# Altium PCB WUT-4-3-3.PcbDoc (part 1 of 2)
Units mil, origin at the board's own origin, x right, y up, seen from the top; angles counter-clockwise.
Board outline 3346.46 x 2204.72 mil, 4 copper layers (Top Layer, GND Plane, 3V3 Plane, Bottom Layer), stack 30.635 mil thick; 173 components, 315 nets, 1031 pads, 178 vias.
Unrouted connection lines stored in the file: 396.
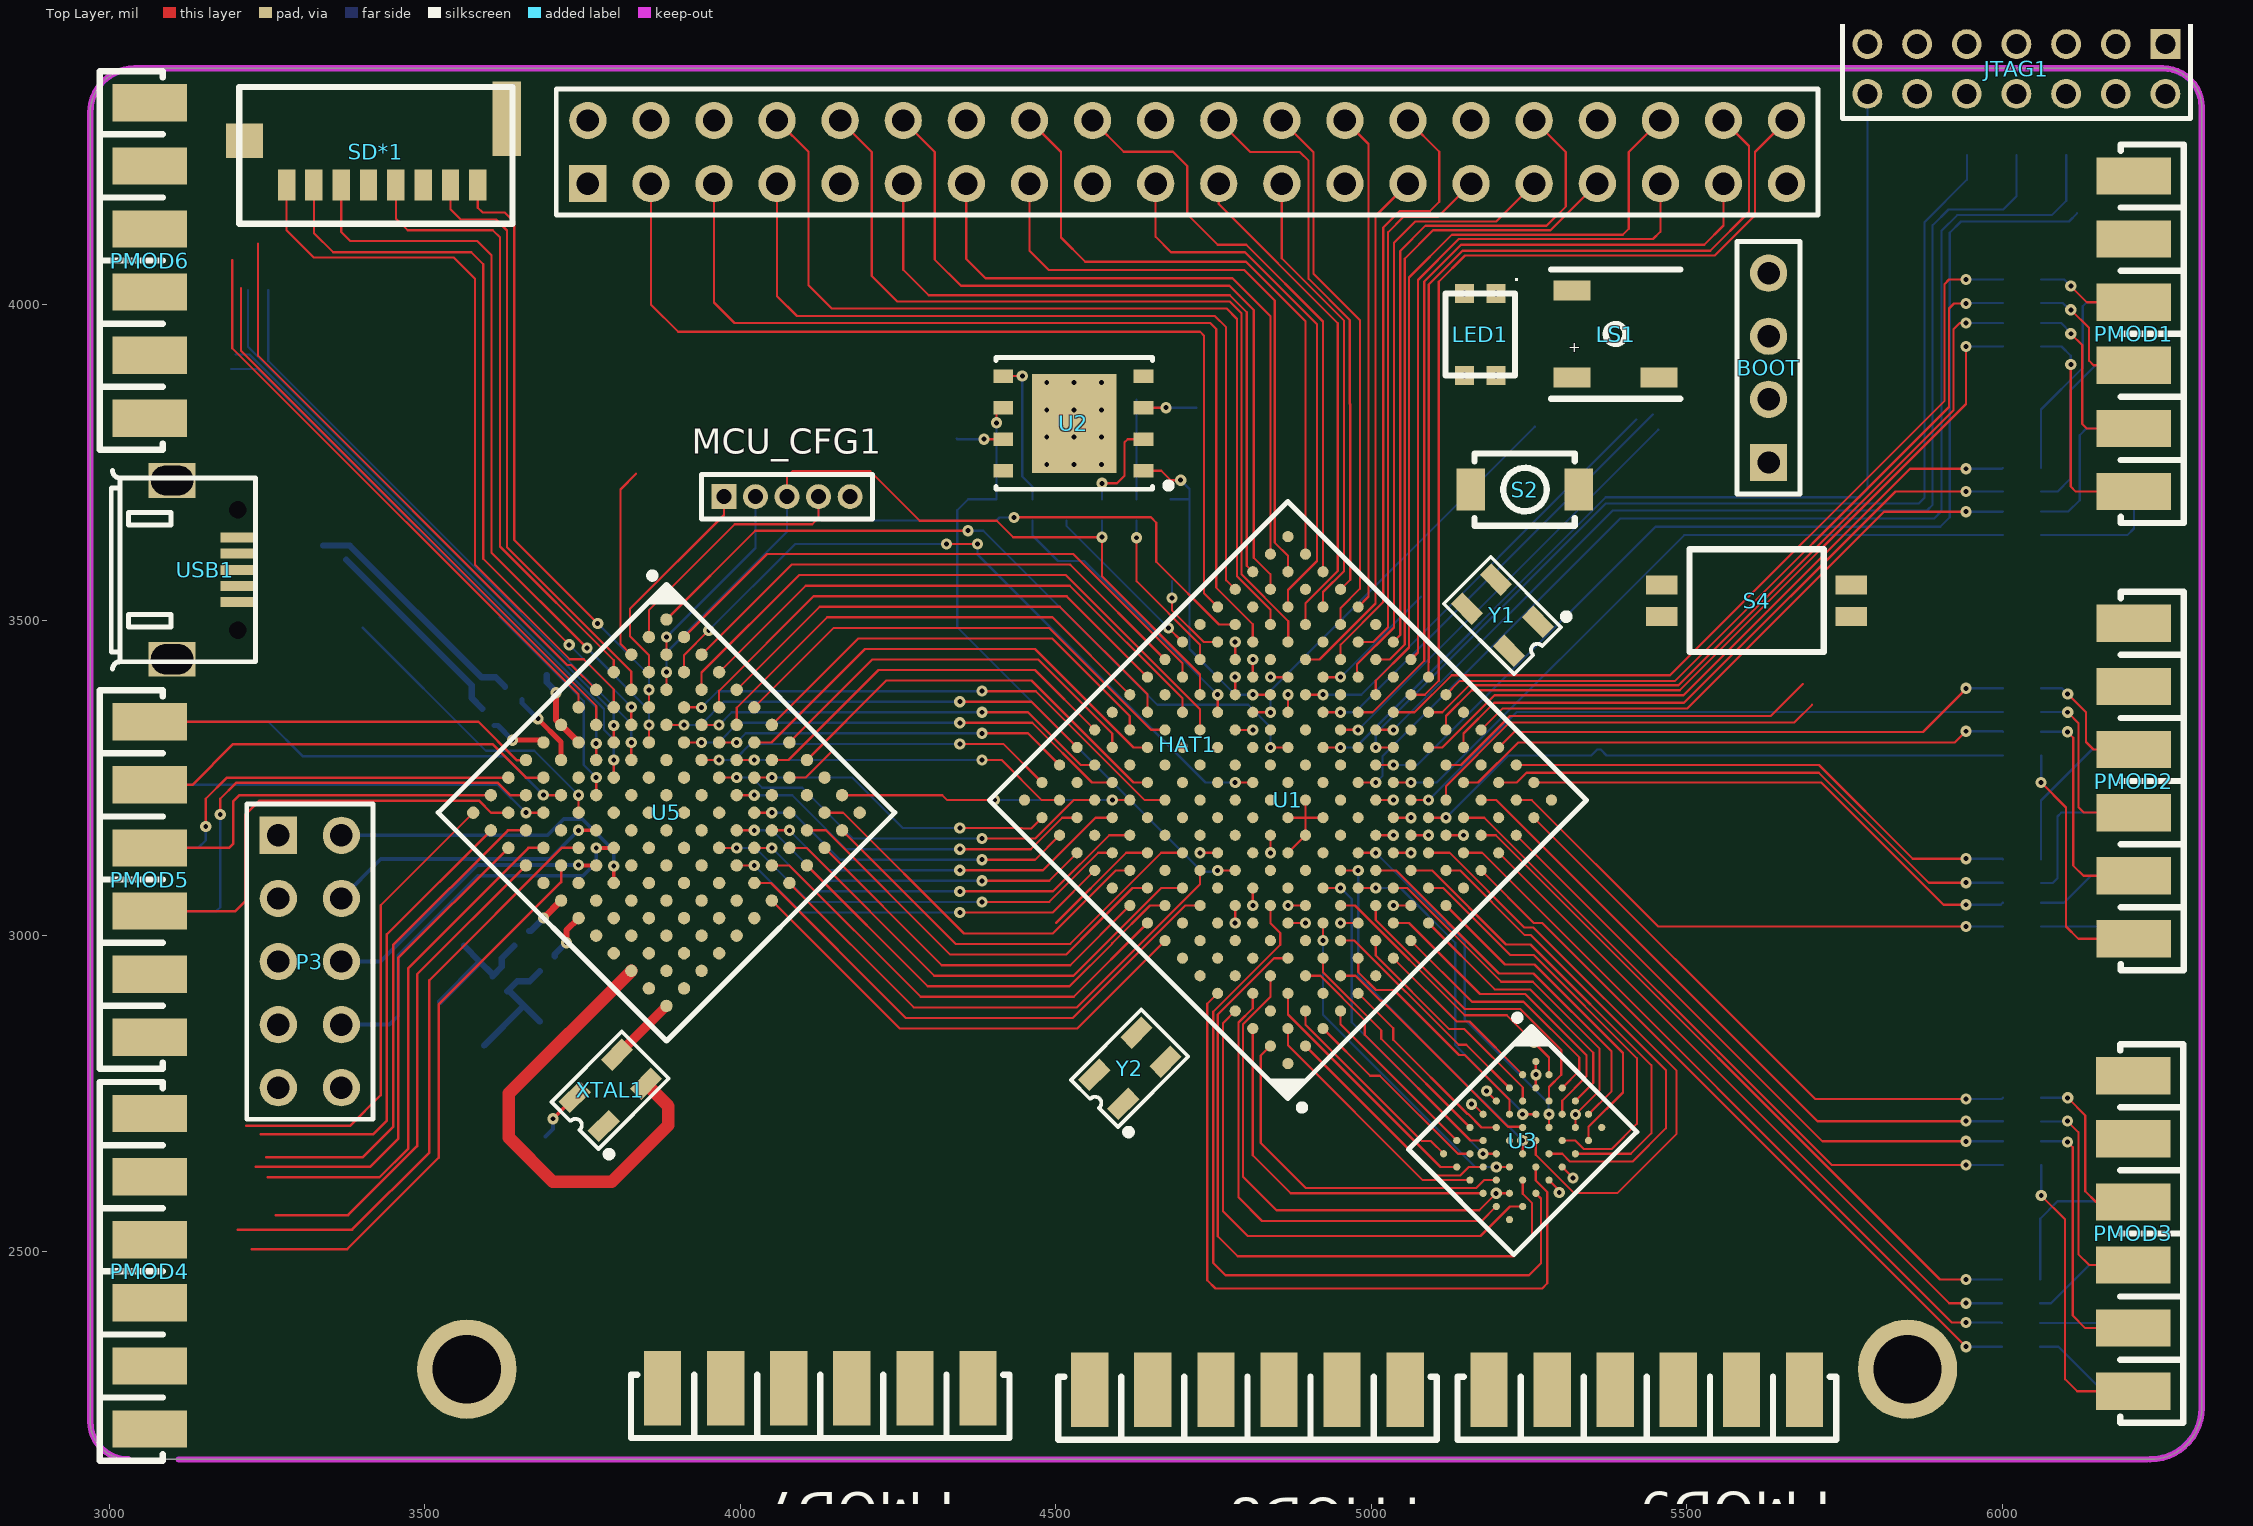
[diagram p0: Top Layer view]
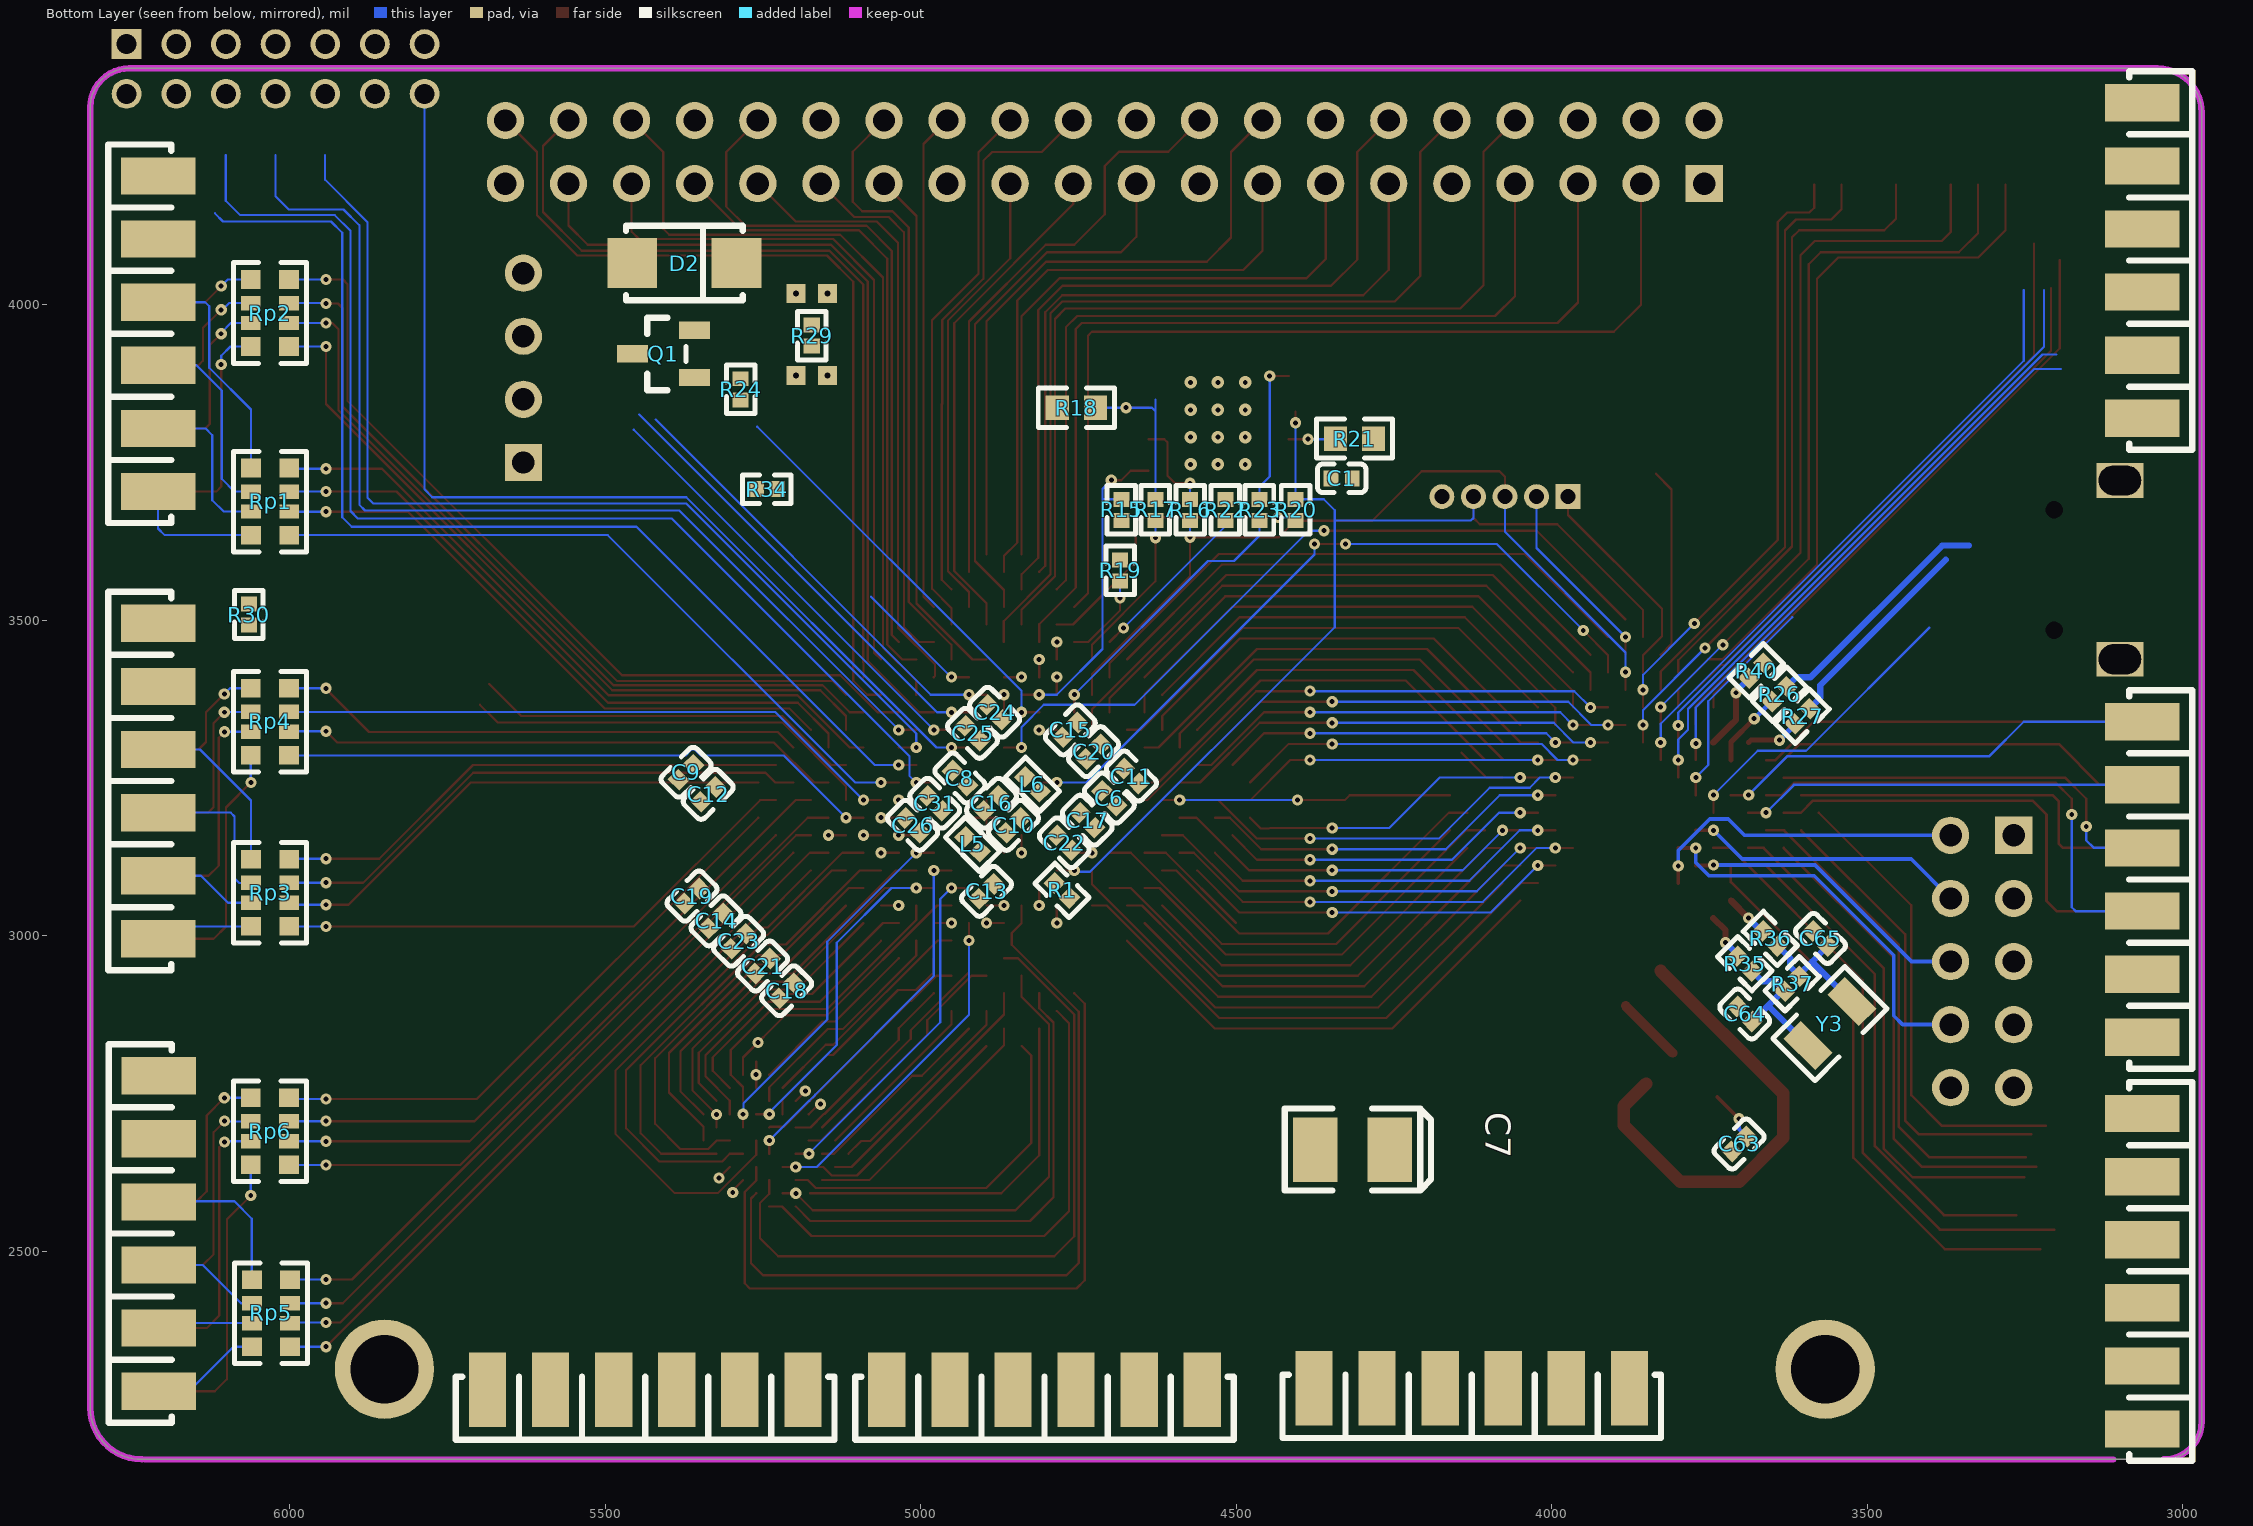
[diagram p1: Bottom Layer view, seen from below]
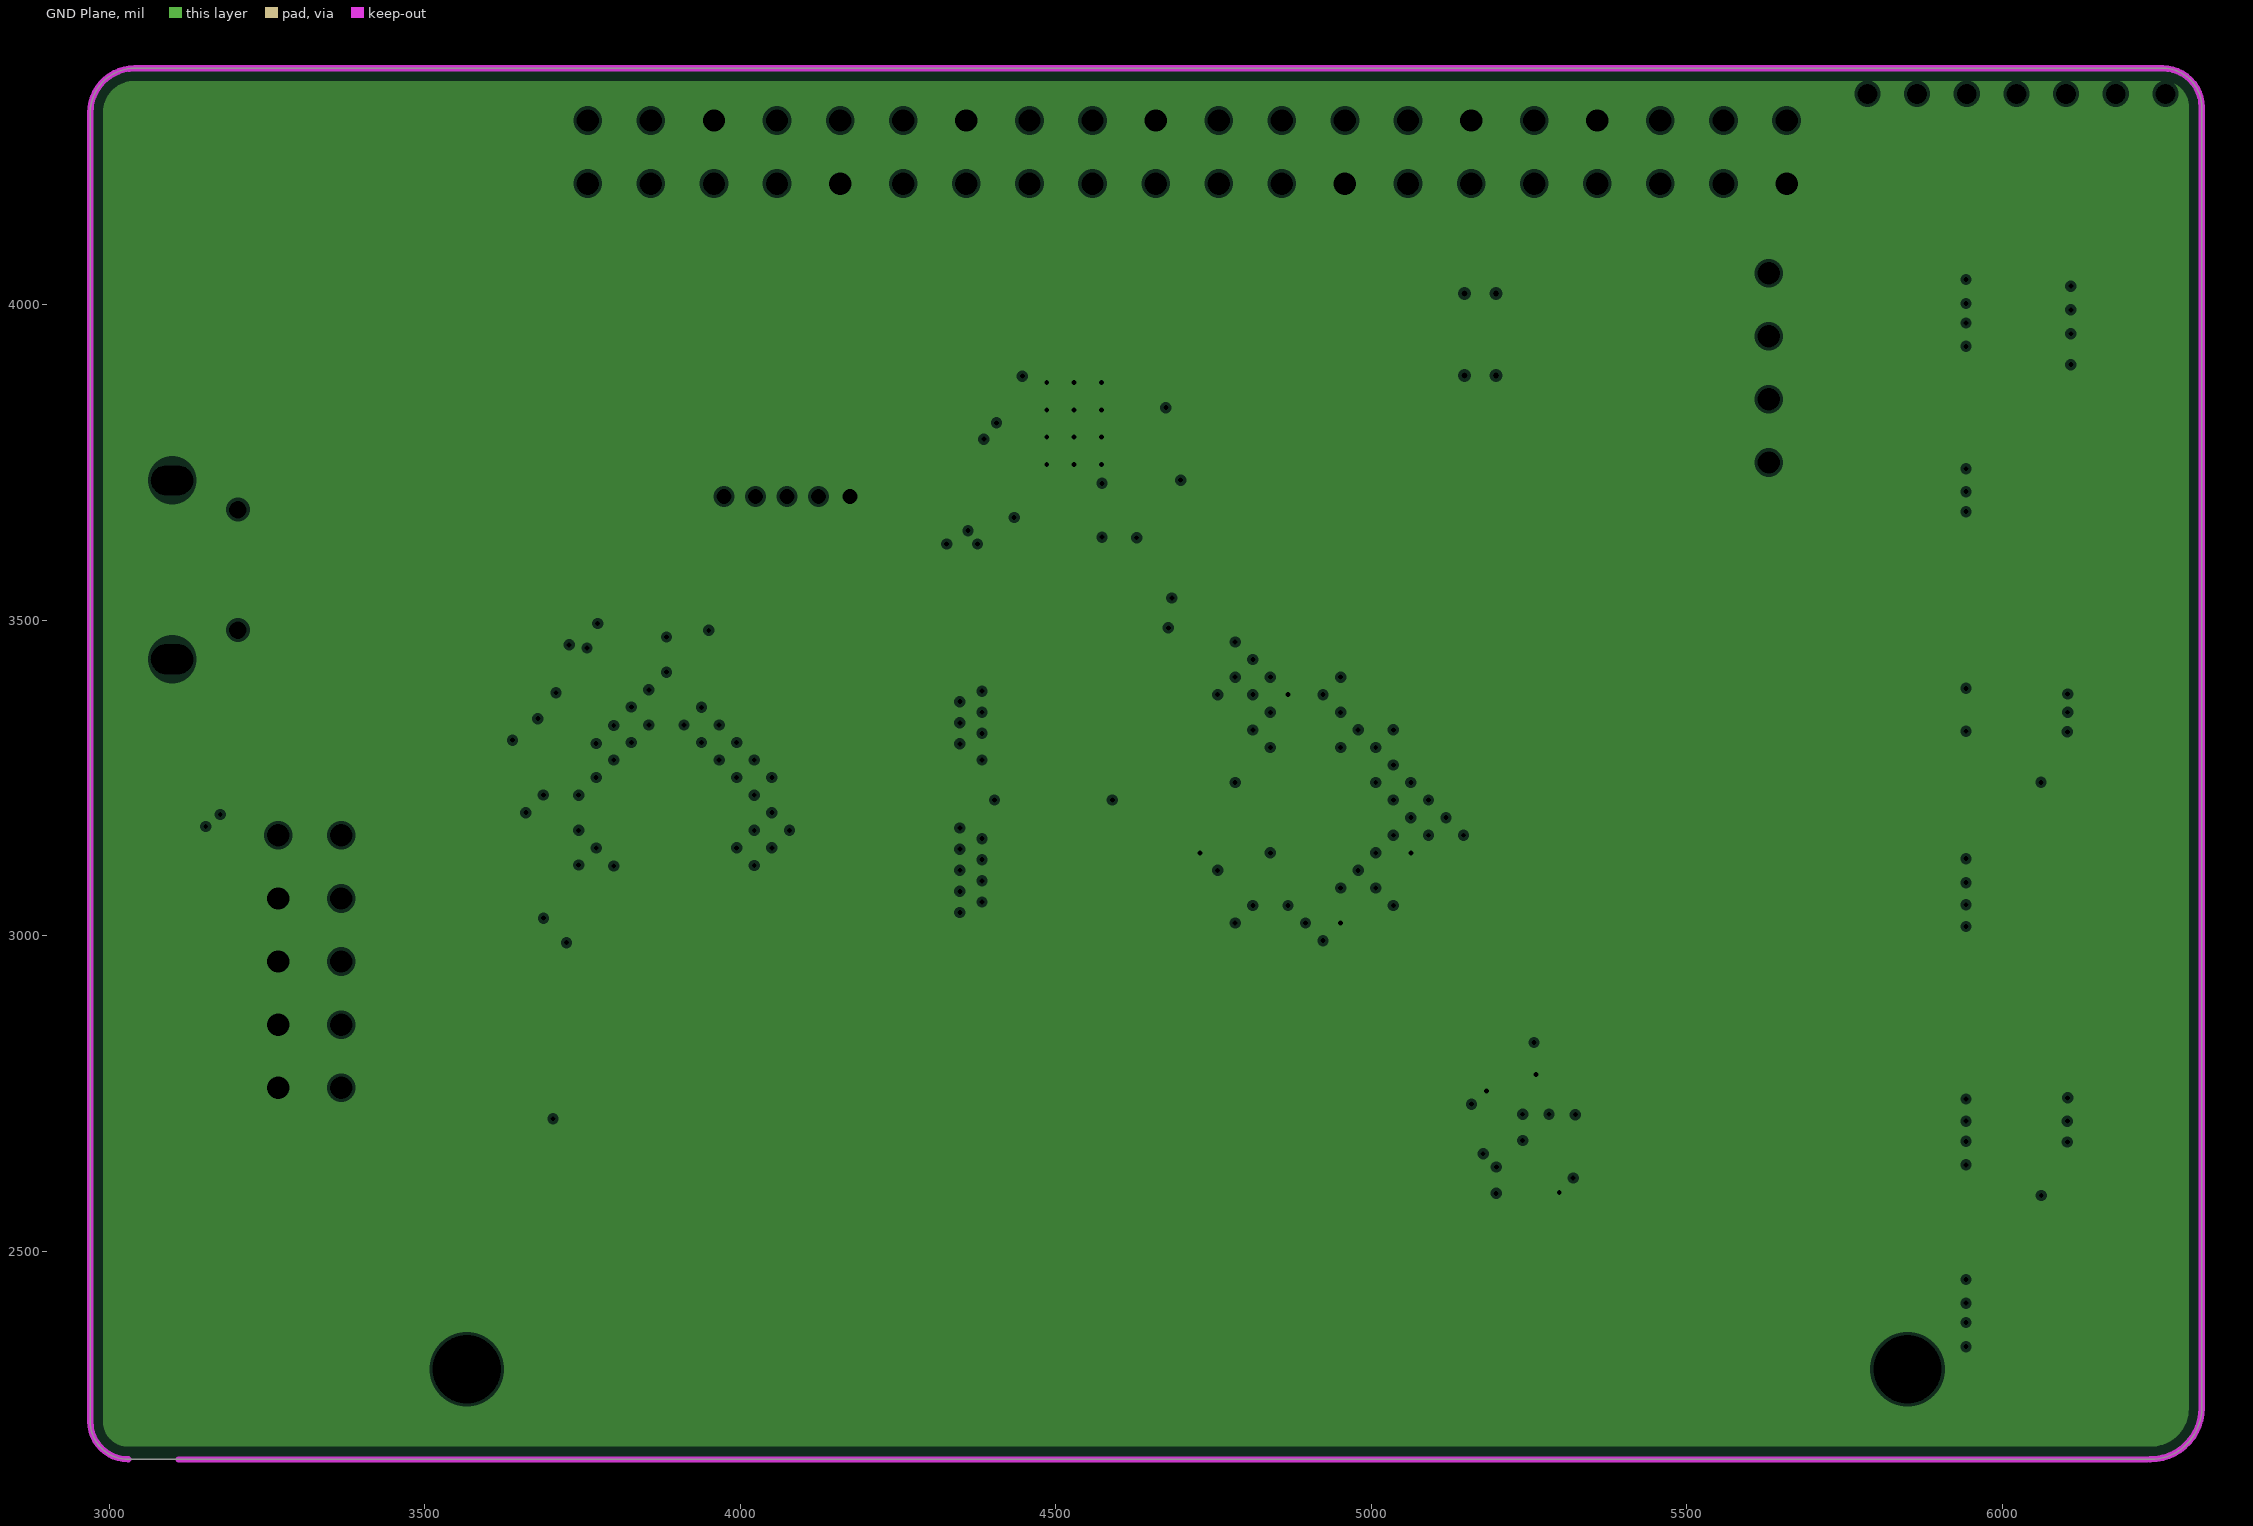
[diagram p2: GND Plane, clearances drawn from the general rule]
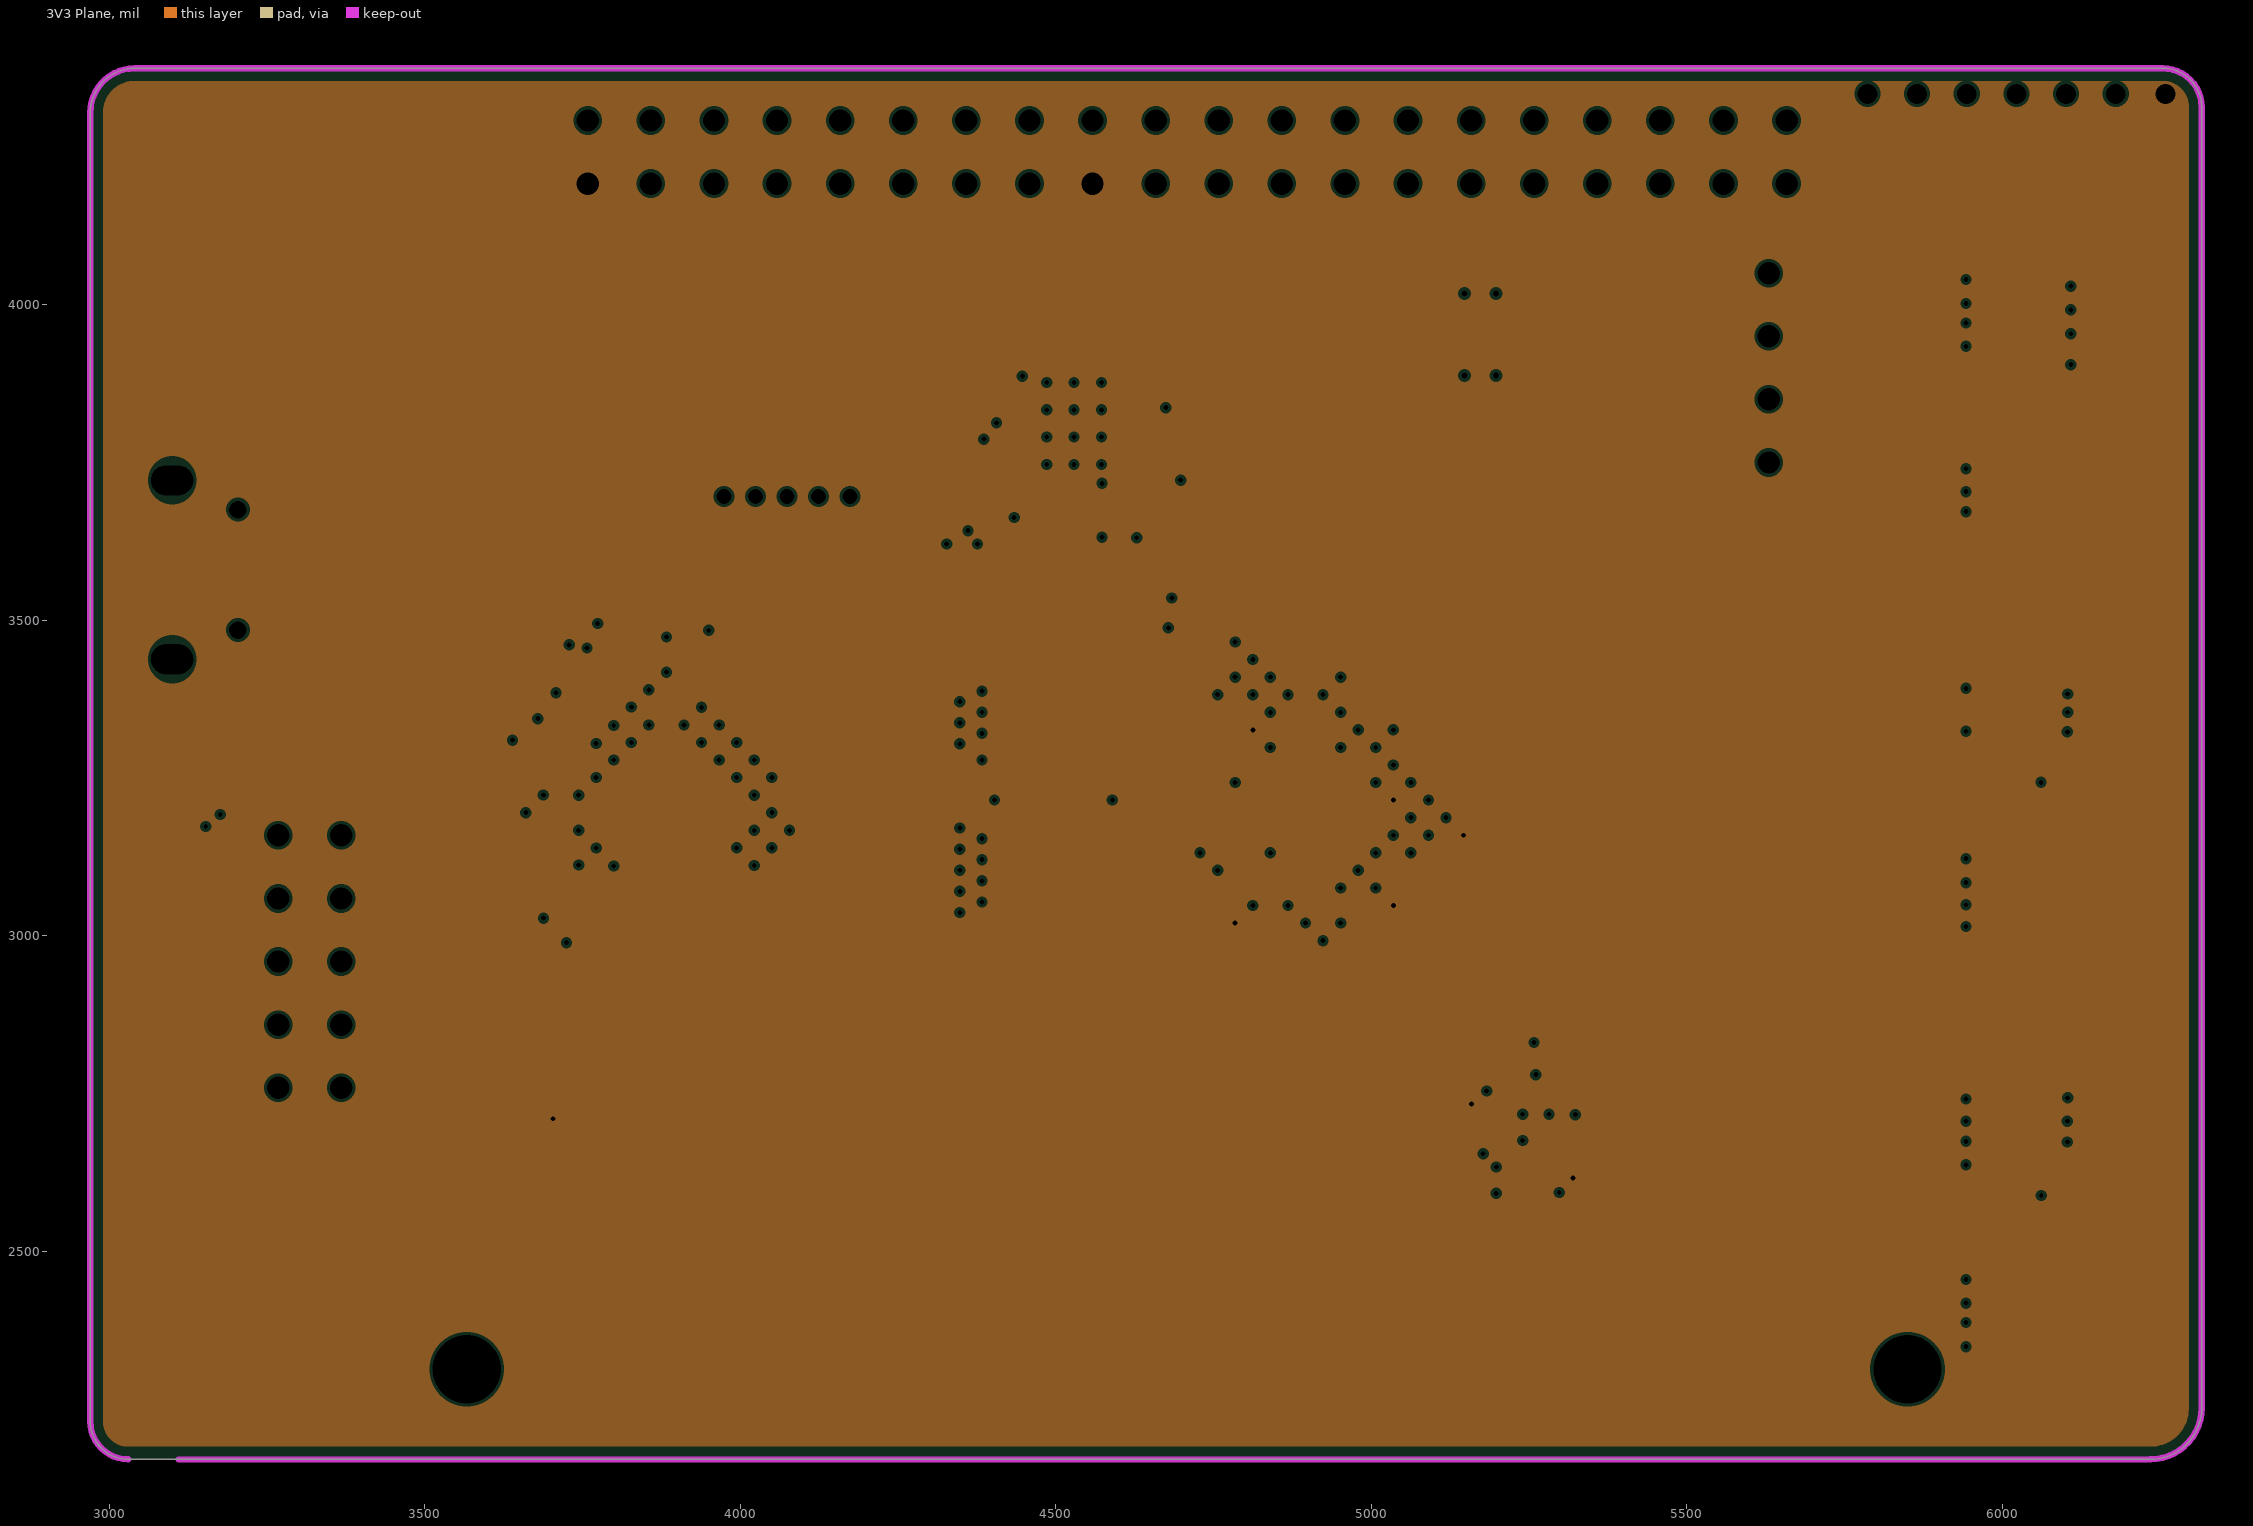
[diagram p3: 3V3 Plane, clearances drawn from the general rule]

## Layer stack, top to bottom
Top Solder: solder mask 0.4, Solder Resist, Dk 3.5
Top Layer: signal copper 1.4
Dielectric 1: core 10, FR-4, Dk 4.2
GND Plane: plane copper 1.4173, net GND
Dielectric 3: prepreg 5, Dk 4.2
3V3 Plane: plane copper 1.4173, net 3V3
Dielectric 2: core 10, Dk 4.2
Bottom Layer: signal copper 1.4
Bottom Solder: solder mask 0.4, Solder Resist, Dk 3.5

## Board outline
2970,2230 ccw(c3030,2230) 3030,2170 6235,2170 ccw(c6235,2251.46) 6316.46,2251.46 6316.46,4313.04 ccw(c6254.78,4313.04) 6254.78,4374.72 3040.22,4374.72 ccw(c3040.22,4304.5) 2970,4304.5

## Design rules (kind name [scope] priority, off if disabled: settings)
Clearance [All] p1: gap=5 ignorepadtopadclearanceinfootprint=FALSE except(0: Arc-Hole Track-Hole SMDPad-Hole THPad-Hole Via-Hole Fill-Hole Poly-Hole Region-Hole Text-Hole; 3.5: Arc-Arc Arc-Track Track-Track; 10: Arc-Text Track-Text SMDPad-Text THPad-Text Via-Text Fill-Text Poly-Text Region-Text Text-Text)
DiffPairsRouting [All] p1: maxlimit=10 minlimit=10 mostfreqgap=10 toplayer_minwidth=6 toplayer_maxwidth=15 toplayer_prefwidth=15 bottomlayer_minwidth=6 bottomlayer_maxwidth=15 bottomlayer_prefwidth=15 maxuncoupledlength=500
PlaneClearance [All] p1: clearance=5
PlaneConnect [All] p1: planeconnectstyle=Direct reliefexpansion=20 reliefentries=4 reliefconductorwidth=10 reliefairgap=10
PolygonConnect [All] p1: connectstyle=Relief reliefconductorwidth=10 reliefentries=4 polygonreliefangle="90 Angle" airgapwidth=10
RoutingVias [All] p1: holewidth=7.87 width=17.72 viastyle="Through Hole" minholewidth=7.87 minwidth=17.72 maxholewidth=248.03 maxwidth=50
SolderMaskExpansion [All] p1: expansion=4
Width [All] p1: maxlimit=80 minlimit=3.5 preferedwidth=10 minimp=50.000000 maximp=50.000000 favimp=50.000000
27 further rules are at their usual default settings.

## Classes and differential pairs
net class SRAM-DQ[15..0]: SRAM-DQ0 SRAM-DQ1 SRAM-DQ2 SRAM-DQ3 SRAM-DQ4 SRAM-DQ5 SRAM-DQ6 SRAM-DQ7 SRAM-DQ8 SRAM-DQ9 SRAM-DQ10 SRAM-DQ11 SRAM-DQ12 SRAM-DQ13 SRAM-DQ14 SRAM-DQ15
net class SRAM-A[19..0]: SRAM-A0 SRAM-A1 SRAM-A2 SRAM-A3 SRAM-A4 SRAM-A5 SRAM-A6 SRAM-A7 SRAM-A8 SRAM-A9 SRAM-A10 SRAM-A11 SRAM-A12 SRAM-A13 SRAM-A14 SRAM-A15 SRAM-A16 SRAM-A17 SRAM-A18 SRAM-A19
net class PTE[5..0]: PTE0 PTE1 PTE2 PTE3 PTE4 PTE5 PTE6 PTE7 PTE8 PTE9 PTE10 PTE11 PTE12 PTE24 PTE25 PTE26 PTE27 PTE28
net class FB_AD[31..0]: FB_AD0 FB_AD1 FB_AD2 FB_AD3 FB_AD4 FB_AD5 FB_AD6 FB_AD7 FB_AD8 FB_AD9 FB_AD10 FB_AD11 FB_AD12 FB_AD13 FB_AD14 FB_AD15 FB_AD16 FB_AD17 FB_AD18 FB_AD19 FB_AD20 FB_AD21 FB_AD22 FB_AD23 FB_AD24 FB_AD25 FB_AD26 FB_AD27 FB_AD28 FB_AD29 FB_AD30 FB_AD31
net class BANK15_IO[9..1]: BANK15_IO1 BANK15_IO2 BANK15_IO3 BANK15_IO4 BANK15_IO5 BANK15_IO6 BANK15_IO7 BANK15_IO8 BANK15_IO9
net class BANK14_IO[42..1]: BANK14_IO1 BANK14_IO2 BANK14_IO3 BANK14_IO4 BANK14_IO5 BANK14_IO6 BANK14_IO7 BANK14_IO8 BANK14_IO9 BANK14_IO10 BANK14_IO11 BANK14_IO12 BANK14_IO13 BANK14_IO14 BANK14_IO15 BANK14_IO16 BANK14_IO17 BANK14_IO18 BANK14_IO19 BANK14_IO20 BANK14_IO21 BANK14_IO22 BANK14_IO23 BANK14_IO24 BANK14_IO25 BANK14_IO26 BANK14_IO27 BANK14_IO28 BANK14_IO29 BANK14_IO30 BANK14_IO31 BANK14_IO32 BANK14_IO33 BANK14_IO34 BANK14_IO35 BANK14_IO36 BANK14_IO37 BANK14_IO38 BANK14_IO39 BANK14_IO40 BANK14_IO41 BANK14_IO42
net class ANALOG[13..0]: ANALOG0 ANALOG1 ANALOG2 ANALOG3 ANALOG4 ANALOG5 ANALOG6 ANALOG7 ANALOG8 ANALOG9 ANALOG10 ANALOG11 ANALOG12 ANALOG13
component class MEMORY: C72 C73 R42 R43 R44 U3
component class MCU: C63 C64 C65 C66 C67 C68 C69 C70 C71 D4 FB5 P3 R35 R36 R37 R38 R39 R40 R41 S6 U5 XTAL1 Y3
component class IO: C59 C60 C61 C62 D1 D2 D3 F1 HAT1 L3 L4 LED1 LS1 LS2 P1 P2 PCAM PMOD1 PMOD2 PMOD3 PMOD4 PMOD5 PMOD6 PMOD7 PMOD8 PMOD9 Q1 Q2 R24 R25 R26 R27 R28 R29 R30 R31 R32 R33 R34 Rp1 Rp2 Rp3 Rp4 Rp5 Rp6 S2 S3 S4 S5 SD*1 USB1
component class FPGA_Power: C6 C7 C8 C9 C10 C11 C12 C13 C14 C15 C16 C17 C18 C19 C20 C21 C22 C23 C24 C25 C26 C27 C28 C29 C30 C31 C32 C33 C34 C35 C36 C37 C38 C39 C40 C41 C42 C43 C44 C45 C46 C47 C48 C49 C50 C51 C52 C53 C54 C55 C56 C57 C58 L5 L6
component class FPGA_IO: C1 C2 C3 C4 C5 FB1 FB2 R15 R16 R17 R18 R19 R20 R21 R22 R23 U2 Y1 Y2
component class FPGA_CFG: BOOT JTAG1 L1 L2 MCU_CFG1 R1 R2 R3 R4 R5 R6 R7 R8 R9 R10 R11 R12 R13 R14 S1 U1
differential pair USB0: +USB0_P -USB0_N
differential pair USB0D: +USB0D_P -USB0D_N

## Components (designator, comment, footprint, x,y, rotation, side; value= is the part's Value field where it differs from the comment)
BOOT "Header 4" HDR1X4 5630,3750 r90 top
C1 "100nF (104) 10% 16V" 0402_C 4333.06,3724.84 r180 bottom
C2 "100nF (104) 10% 16V" 0402_C 7445,2140 r180 bottom
C3 "100pF (101) 5% 50V" 0402_C 7615,2140 r180 bottom
C4 "100nF (104) 10% 16V" 0402_C 7785,2140 r180 bottom
C5 "100pF (101) 5% 50V" 0402_C 7955,2140 r180 bottom
C6 "10uF (106) 20% 6.3V" 0402_C 4701.33,3218.01 r45 bottom
C7 "100uF (107) ±10% 6.3V" CASE-B_3528 4316,2661 r180 bottom
C8 "33nF (333) 20% 50V" 0402_C 4938.16,3249.84 r45 bottom
C9 "10uF (106) 20% 6.3V" 0402_C 5372.17,3258.96 r315 bottom
C10 "470nF (474) 10% 10V" 0402_C 4853.16,3174.84 r135 bottom
C11 "470nF (474) 10% 10V" 0402_C 4666.33,3253.01 r45 bottom
C12 "4.7uF (475) 20% 10V" 0402_C 5337.17,3223.96 r315 bottom
C13 "4.7uF (475) 20% 10V" 0402_C 4896,3070.24 r135 bottom
C14 "33nF (333) 20% 50V" 0402_C 5324.75,3023.45 r135 bottom
C15 "470nF (474) 10% 10V" 0402_C 4763.16,3326.19 r315 bottom
C16 "10nF (103) 10% 50V" 0402_C 4888.16,3209.84 r135 bottom
C17 "33nF (333) 20% 50V" 0402_C 4736.33,3183.01 r45 bottom
C18 "4.7uF (475) 20% 10V" 0402_C 5212.83,2912.62 r135 bottom
C19 "33nF (333) 20% 50V" 0402_C 5362.82,3062.73 r135 bottom
C20 "470nF (474) 10% 10V" 0402_C 4726.33,3291.67 r315 bottom
C21 "470nF (474) 10% 10V" 0402_C 5250.9,2951.91 r135 bottom
C22 "33nF (333) 20% 50V" 0402_C 4772.81,3147.33 r45 bottom
C23 "470nF (474) 10% 10V" 0402_C 5288.97,2991.19 r135 bottom
C24 "33nF (333) 20% 50V" 0402_C 4883.16,3354.03 r225 bottom
C25 "33nF (333) 20% 50V" 0402_C 4918.16,3320.67 r225 bottom
C26 "33nF (333) 20% 50V" 0402_C 5013.16,3174.84 r225 bottom
C27 "33nF (333) 20% 50V" 0402_C 4060,4755 r90 bottom
C28 "33nF (333) 20% 50V" 0402_C 3990,5065 r90 bottom
C29 "33nF (333) 20% 50V" 0402_C 3970,5350 r90 bottom
C30 "33nF (333) 20% 50V" 0402_C 3860,5590 r90 bottom
C31 "470nF (474) 10% 10V" 0402_C 4978.16,3209.84 r225 bottom
C32 "33nF (333) 20% 50V" 0402_C 4120,4760 r90 bottom
C33 "470nF (474) 10% 10V" 0402_C 4055,5060 r90 bottom
C34 "470nF (474) 10% 10V" 0402_C 4025,5355 r90 bottom
C35 "33nF (333) 20% 50V" 0402_C 3920,5590 r90 bottom
C36 "470nF (474) 10% 10V" 0402_C 4180,4760 r90 bottom
C37 "470nF (474) 10% 10V" 0402_C 4115,5060 r90 bottom
C38 "470nF (474) 10% 10V" 0402_C 4090,5360 r90 bottom
C39 "470nF (474) 10% 10V" 0402_C 3985,5590 r90 bottom
C40 "470nF (474) 10% 10V" 0402_C 4245,4755 r90 bottom
C41 "470nF (474) 10% 10V" 0402_C 4180,5060 r90 bottom
C42 "470nF (474) 10% 10V" 0402_C 4160,5360 r90 bottom
C43 "470nF (474) 10% 10V" 0402_C 4045,5585 r90 bottom
C44 "470nF (474) 10% 10V" 0402_C 4315,4760 r90 bottom
C45 "470nF (474) 10% 10V" 0402_C 4245,5055 r90 bottom
C46 "470nF (474) 10% 10V" 0402_C 4240,5355 r90 bottom
C47 "470nF (474) 10% 10V" 0402_C 4110,5585 r90 bottom
C48 "470nF (474) 10% 10V" 0402_C 4375,4760 r90 bottom
C49 "10uF (106) 20% 6.3V" 0402_C 4315,5050 r90 bottom
C50 "10uF (106) 20% 6.3V" 0402_C 4315,5355 r90 bottom
C51 "470nF (474) 10% 10V" 0402_C 4175,5585 r90 bottom
C52 "4.7uF (475) 20% 10V" 0402_C 4445,4760 r90 bottom
C53 "100uF (107) ±10% 6.3V" CASE-B_3528 4425,5015 r90 bottom
C54 "100uF (107) ±10% 6.3V" CASE-B_3528 4430,5350 r90 bottom
C55 "4.7uF (475) 20% 10V" 0402_C 4230,5585 r90 bottom
C56 "4.7uF (475) 20% 10V" 0402_C 4515,4760 r90 bottom
C57 "4.7uF (475) 20% 10V" 0402_C 4300,5580 r90 bottom
C58 "100uF (107) ±10% 6.3V" CASE-B_3528 4630,4755 r90 bottom
C59 "22uF (226) 20% 6.3V" 0603_C 7302,3221 r90 bottom
C60 "22uF (226) 20% 6.3V" 0603_C 5672,5098 r90 bottom
C61 "22uF (226) 20% 6.3V" 0603_C 4677,5123 r180 bottom
C62 "22uF (226) 20% 6.3V" 0603_C 3327,5098 r90 bottom
C63 "100nF (104) 10% 16V" 0402_C 3703.16,2669.84 r135 bottom
C64 "12pF (120) 5% 50V" 0402_C 3694.33,2875.84 r45 bottom
C65 "12pF (120) 5% 50V" 0402_C 3574.23,2995.6 r45 bottom
C66 "10nF (103) 10% 50V" 0402_C 4337,6288 r90 bottom
C67 "100nF (104) 10% 16V" 0402_C 4107,6288 r90 bottom
C68 "100nF (104) 10% 16V" 0402_C 4567,6288 r90 bottom
C69 "100nF (104) 10% 16V" 0402_C 4797,6288 r90 bottom
C70 "100nF (104) 10% 16V" 0402_C 5027,6288 r90 bottom
C71 "100nF (104) 10% 16V" 0402_C 8657,4411 r90 bottom
C72 "Cap" 1608[0603] 3312,6743 r90 top value=104P
C73 "Cap" 1608[0603] 3542,6743 r90 top value=104P
D1 "SS54" SMA(DO-214AC)_S1 7115,4965 r90 bottom
D2 "SS54" SMA(DO-214AC)_S1 5375,4066 r0 bottom
D3 "SS54" SMA(DO-214AC)_S1 9327,3106 r90 bottom
D4 "SK34" C2012 5317,6278 r0 top
F1 "Fuse 1" 1206 7325,5095 r0 top
FB1 "600Ω ±25% 100MHz" 0805_L 9060,2125 r180 bottom
FB2 "600Ω ±25% 100MHz" 0805_L 9270,2125 r180 bottom
FB5 "100Ω ±25% 100MHz" 0805_L 3362,6288 r180 bottom
HAT1 "respberry-HAT" RESPBERRY-HAT 4708.5,4242 r0 top locked
JTAG1 "MHDR2X7" "Hearder2 7X2" 6259,4413 r270 top
L1 "LED" 1608[0603] 8630,1735 r0 top
L2 "LED" 1608[0603] 8780,1735 r0 top
L3 "LED" 1608[0603] 8415,3775 r0 top
L4 "LED" 1608[0603] 8035,3775 r0 top
L5 "10nH 5%" 0402_L 4918.16,3144.84 r45 bottom
L6 "39nH" 0402_L 4823.16,3239.84 r45 bottom
LED1 "RGB_LED1206" RGB 5173,3952.73 r270 top
LS1 "Bell" "MLT-5020 BZ" 5387.5,3953.48 r0 top
LS2 "Bell" BZ 2345,3755 r0 top
MCU_CFG1 "Header 5" MHDR1X5 3974.22,3695.84 r0 top
P3 "JTAG" HDR2X5 3268,3159 r270 top
PCAM "Header 15" FFC/SM0.5-2H15 5353,1559 r0 top
PMOD1 "Header 6X2A" "SMT-HEADER 6*2" 6209,3954 r0 top
PMOD2 "Header 6X2A" "SMT-HEADER 6*2" 6209,3245 r0 top
PMOD3 "Header 6X2A" "SMT-HEADER 6*2" 6208,2528 r0 top
PMOD4 "Header 6X2A" "SMT-HEADER 6*2" 3064,2468 r180 top
PMOD5 "Header 6X2A" "SMT-HEADER 6*2" 3064,3089 r180 top
PMOD6 "Header 6X2A" "SMT-HEADER 6*2" 3064,4070 r180 top
PMOD7 "Header 6X2A" "SMT-HEADER 6*2" 4127,2283 r270 top
PMOD8 "Header 6X2A" "SMT-HEADER 6*2" 4804,2280 r270 top
PMOD9 "Header 6X2A" "SMT-HEADER 6*2" 5437,2280 r270 top
Q1 "SS8050 Y1" SOT-23(SOT-23-3) 5408,3922 r180 bottom
Q2 "SS8050 Y1" SOT-23(SOT-23-3) 8402,3221 r180 bottom
R1 "4.7KΩ (4701) ±1%" 0402_R 4776.33,3071.65 r45 bottom
R2 "Res" 1608[0603] 7610,1735 r0 top value=1K
R3 "不贴" 1608[0603] 7100,1735 r0 top value=1K
R4 "不贴" 1608[0603] 7780,1735 r0 top value=1K
R5 "Res" 1608[0603] 7270,1735 r0 top value=1K
R6 "不贴" 1608[0603] 7950,1735 r0 top value=1K
R7 "Res" 1608[0603] 7440,1735 r0 top value=1K
R8 "200Ω (2000) ±1%" 0402_R 9760,1730 r180 bottom
R9 "100Ω (1000) ±1%" 0402_R 9220,1730 r180 bottom
R10 "4.7KΩ (4701) ±1%" 0402_R 9915,1715 r90 bottom
R11 "4.7KΩ (4701) ±1%" 0402_R 10150,1730 r180 bottom
R12 "100Ω (1000) ±1%" 0402_R 9375,1715 r90 bottom
R13 "10KΩ (1002) ±1%" 0402_R 10665,1715 r90 bottom
R14 "10KΩ (1002) ±1%" 0402_R 10885,1715 r90 bottom
R15 "4.7KΩ (4701) ±1%" 0402_R 4682.22,3674.84 r270 bottom
R16 "100Ω (1000) ±1%" 0402_R 4573.4,3674.84 r90 bottom
R17 "100Ω (1000) ±1%" 0402_R 4628.4,3674.84 r90 bottom
R18 "1.8KΩ (1801) ±1%" 0603_R 4753.59,3836.84 r0 bottom
R19 "1KΩ (1001) ±1%" 0402_R 4684.22,3578.84 r90 bottom
R20 "49.9Ω (49R9) ±1%" 0402_R 4406.22,3674.84 r90 bottom
R21 "1.8KΩ (1801) ±1%" 0603_R 4312.85,3787.84 r180 bottom
R22 "100Ω (1000) ±1%" 0402_R 4517.4,3674.84 r270 bottom
R23 "100Ω (1000) ±1%" 0402_R 4463.4,3674.84 r270 bottom
R24 "1.5KΩ (1501) ±1%" 0402_R 5285.74,3866 r90 bottom
R25 "1.5KΩ (1501) ±1%" 0402_R 8557,3241 r90 bottom
R26 "0Ω (0R0) ±1%" 0402_R 3639.22,3382.84 r315 bottom
R27 "0Ω (0R0) ±1%" 0402_R 3603.22,3347.84 r315 bottom
R28 "390Ω (3900) ±1%" 0805_R 7125,1115 r180 bottom
R29 "1KΩ (1001) ±1%" 0402_R 5173,3951 r90 bottom
R30 "1KΩ (1001) ±1%" 0402_R 6065,3509 r90 bottom
R31 "0Ω (0R0) ±1%" 0402_R 6242,5118 r90 bottom
R32 "2KΩ (2001) ±1%" 0402_R 8180,3755 r90 bottom
R33 "2KΩ (2001) ±1%" 0402_R 9467,3241 r90 bottom
R34 "1KΩ (1001) ±1%" 0402_R 5244,3707.83 r180 bottom
R35 "0Ω (0R0) ±1%" 0402_R 3694.23,2955.6 r225 bottom
R36 "0Ω (0R0) ±1%" 0402_R 3653.68,2995.6 r225 bottom
R37 "1MΩ (1004) ±1%" 0402_R 3619.23,2923.84 r315 bottom
R38 "0Ω (0R0) ±1%" 0402_R 5742,6288 r90 bottom
R39 "10KΩ (1002) ±1%" 0402_R 5972,6288 r90 bottom
R40 "10KΩ (1002) ±1%" 0402_R 3676,3420 r315 bottom
R41 "10KΩ (1002) ±1%" 0402_R 9142,4411 r90 bottom
R42 "Res" 1608[0603] 3772,6743 r90 top value=10K
R43 "Res" 1608[0603] 3982,6743 r90 top value=10K
R44 "Res" 1608[0603] 4212,6743 r90 top value=10K
Rp1 "470Ω (471) ±5%" 0603_Rx4 6031.49,3688 r270 bottom
Rp2 "470Ω (471) ±5%" 0603_Rx4 6031.81,3986.85 r270 bottom
Rp3 "470Ω (471) ±5%" 0603_Rx4 6031.49,3067.85 r270 bottom
Rp4 "470Ω (471) ±5%" 0603_Rx4 6031.81,3338.85 r270 bottom
Rp5 "470Ω (471) ±5%" 0603_Rx4 6030.12,2401.7 r270 bottom
Rp6 "470Ω (471) ±5%" 0603_Rx4 6031.81,2689.85 r270 bottom
S1 "SW-PB" "key 3*4*2" 6865,2090 r0 top
S2 "SW-PB" "key 3*4*2" 5244,3707 r0 top
S3 "SW-PB" "key 3*4*2" 8162,3221 r0 top
S4 "SW DIP-2" sw*2 5611,3531 r180 top
S5 "SW DIP-2" sw*2 6682,3106 r90 top
S6 "SW-PB" "key 3*4*2" 8952,4391 r0 top
SD*1 "TF_card" TF卡座(短体) 3639.22,4345 r180 top
U1 "XC7A35T-1FTG256" BGA100P9X9-81A 4868.16,3214.84 r135 top locked
U2 "N25Q032A" QFN127P500X600X100_HS-9N 4529.22,3811.84 r180 top
U3 "EM7164SU16" BGA48C75P6X8_598X698X104 5240.22,2675.2 r315 top
U5 "MK64BGA144" BGA144C100P12X12_1300X1300X161 3883.16,3194.84 r315 top locked
USB1 "USB_5line" USB-MICRO-5P-2F 3204,3631 r90 top
XTAL1 "50M有源晶体" XTAL7_3225 3794.22,2754.84 r45 top
Y1 "100MHZ" XTAL7_3225 5208.22,3507.84 r135 top
Y2 "XMHZ" XTAL7_3225 4617.61,2789.84 r45 top
Y3 "32.768KHz ±20ppm 12.5pF" "SMD-3215_2P FC - 135" 3559.23,2860.6 r315 bottom

## Footprints (in the part's own frame and the unit in brackets; to place one, negate y for a bottom-side part, rotate by r counter-clockwise, add the part's x,y. Pads: shape width x height; smd on the part's side, far side on the other; paste and mask are expansions set on the pad)
0402_C [mm]
  rect 0.6x0.65 smd mask+0.051: 1(-0.425,0) 2(0.425,0)
  silkscreen extent -0.97,-0.58 0.97,0.58, body extent -0.48,-0.3 0.52,0.3, height 0.2
0402_L [mm]
  rect 0.6x0.65 smd mask+0.051: 1(-0.425,0) 2(0.425,0)
  silkscreen extent -0.97,-0.58 0.97,0.58, body extent -0.49,-0.26 0.52,0.26, height 0.36
0402_R [mm]
  rect 0.6x0.65 smd mask+0.051: 1(-0.425,0) 2(0.425,0)
  silkscreen extent -0.97,-0.58 0.97,0.58, body extent -0.57,-0.27 0.58,0.28, height 0.41
0603_C [mm]
  rect 0.93x0.98 smd: 1(-0.77,0) 2(0.77,0)
  silkscreen extent -1.53,-0.79 1.54,0.79, body extent -0.8,-0.4 0.8,0.4, height 0.3
0603_R [mm]
  rect 0.93x0.98 smd: 1(-0.77,0) 2(0.77,0)
  silkscreen extent -1.53,-0.79 1.54,0.79, body extent -0.85,-0.4 0.85,0.4, height 0.56
0603_Rx4 [mm]
  rect 0.75x0.8 smd mask+0.051: 1(-1.35,-0.77) 4(1.35,-0.77) 5(1.35,0.77) 8(-1.35,0.77)
  rect 0.58x0.8 smd mask+0.051: 2(-0.4,-0.77) 3(0.4,-0.77) 6(0.4,0.77) 7(-0.4,0.77)
  silkscreen extent -2.02,-1.47 2.02,1.47, body extent -1.6,-0.8 1.6,0.8, height 0.55
0805_L [mm]
  rect 1.16x1.47 smd: 1(-0.89,0) 2(0.89,0)
  silkscreen extent -1.77,-1.04 1.77,1.03, body extent -1,-0.64 1,0.64, height 0.6
0805_R [mm]
  rect 1.16x1.47 smd: 1(-0.89,0) 2(0.89,0)
  silkscreen extent -1.77,-1.04 1.77,1.03, body extent -1,-0.63 1,0.63, height 0.49
1206 [mm]
  rect 1.05x1.75 smd: 1(-1.575,0) 2(1.575,0)
  silkscreen extent -0.65,-0.77 0.65,0.77, body extent -1.6,-0.8 1.6,0.8, height 1.6
1608[0603] [mm] "Chip Capacitor, Body 1.6x0.8mm, IPC High Density"
  rect 0.8x0.9 smd: 1(-0.7,0) 2(0.7,0)
  body extent -0.87,-0.48 0.87,0.48, height 1.3
BGA48C75P6X8_598X698X104 [mm] "BGA, 48-Leads, Body 5.98x6.98mmx1.04mm, Pitch 0.75mm"
  round 0.29 smd: A1(-1.875,2.625) A2(-1.125,2.625) A3(-0.375,2.625) A4(0.375,2.625) A5(1.125,2.625) A6(1.875,2.625) B1(-1.875,1.875) B2(-1.125,1.875) B3(-0.375,1.875) B4(0.375,1.875) B5(1.125,1.875) B6(1.875,1.875) C1(-1.875,1.125) C2(-1.125,1.125) C3(-0.375,1.125) C4(0.375,1.125) C5(1.125,1.125) C6(1.875,1.125) D1(-1.875,0.375) D2(-1.125,0.375) D3(-0.375,0.375) D4(0.375,0.375) D5(1.125,0.375) D6(1.875,0.375) E1(-1.875,-0.375) E2(-1.125,-0.375) E3(-0.375,-0.375) E4(0.375,-0.375) E5(1.125,-0.375) E6(1.875,-0.375) F1(-1.875,-1.125) F2(-1.125,-1.125) F3(-0.375,-1.125) F4(0.375,-1.125) F5(1.125,-1.125) F6(1.875,-1.125) G1(-1.875,-1.875) G2(-1.125,-1.875) G3(-0.375,-1.875) G4(0.375,-1.875) G5(1.125,-1.875) G6(1.875,-1.875) H1(-1.875,-2.625) H2(-1.125,-2.625) H3(-0.375,-2.625) H4(0.375,-2.625) H5(1.125,-2.625) H6(1.875,-2.625)
  silkscreen extent -3.77,-3.5 3,3.5, body extent -2.99,-3.49 2.99,3.49, height 1.04
BGA100P9X9-81A [mm] "XC7A35T-1FTG256"
  round 0.45 smd: A1(-7.5,7.5) A2(-6.5,7.5) A3(-5.5,7.5) A4(-4.5,7.5) A5(-3.5,7.5) A6(-2.5,7.5) A7(-1.5,7.5) A8(-0.5,7.5) A9(0.5,7.5) A10(1.5,7.5) A11(2.5,7.5) A12(3.5,7.5) A13(4.5,7.5) A14(5.5,7.5) A15(6.5,7.5) A16(7.5,7.5) B1(-7.5,6.5) B2(-6.5,6.5) B3(-5.5,6.5) B4(-4.5,6.5) B5(-3.5,6.5) B6(-2.5,6.5) B7(-1.5,6.5) B8(-0.5,6.5) B9(0.5,6.5) B10(1.5,6.5) B11(2.5,6.5) B12(3.5,6.5) B13(4.5,6.5) B14(5.5,6.5) B15(6.5,6.5) B16(7.5,6.5) C1(-7.5,5.5) C2(-6.5,5.5) C3(-5.5,5.5) C4(-4.5,5.5) C5(-3.5,5.5) C6(-2.5,5.5) C7(-1.5,5.5) C8(-0.5,5.5) C9(0.5,5.5) C10(1.5,5.5) C11(2.5,5.5) C12(3.5,5.5) C13(4.5,5.5) C14(5.5,5.5) C15(6.5,5.5) C16(7.5,5.5) D1(-7.5,4.5) D2(-6.5,4.5) D3(-5.5,4.5) D4(-4.5,4.5) D5(-3.5,4.5) D6(-2.5,4.5) D7(-1.5,4.5) D8(-0.5,4.5) D9(0.5,4.5) D10(1.5,4.5) D11(2.5,4.5) D12(3.5,4.5) D13(4.5,4.5) D14(5.5,4.5) D15(6.5,4.5) D16(7.5,4.5) E1(-7.5,3.5) E2(-6.5,3.5) E3(-5.5,3.5) E4(-4.5,3.5) E5(-3.5,3.5) E6(-2.5,3.5) E7(-1.5,3.5) E8(-0.5,3.5) E9(0.5,3.5) E10(1.5,3.5) E11(2.5,3.5) E12(3.5,3.5) E13(4.5,3.5) E14(5.5,3.5) E15(6.5,3.5) E16(7.5,3.5) F1(-7.5,2.5) F2(-6.5,2.5) F3(-5.5,2.5) F4(-4.5,2.5) F5(-3.5,2.5) F6(-2.5,2.5) F7(-1.5,2.5) F8(-0.5,2.5) F9(0.5,2.5) F10(1.5,2.5) F11(2.5,2.5) F12(3.5,2.5) F13(4.5,2.5) F14(5.5,2.5) F15(6.5,2.5) F16(7.5,2.5) G1(-7.5,1.5) G2(-6.5,1.5) G3(-5.5,1.5) G4(-4.5,1.5) G5(-3.5,1.5) G6(-2.5,1.5) G7(-1.5,1.5) G8(-0.5,1.5) G9(0.5,1.5) G10(1.5,1.5) G11(2.5,1.5) G12(3.5,1.5) G13(4.5,1.5) G14(5.5,1.5) G15(6.5,1.5) G16(7.5,1.5) H1(-7.5,0.5) H2(-6.5,0.5) H3(-5.5,0.5) H4(-4.5,0.5) H5(-3.5,0.5) H6(-2.5,0.5) H7(-1.5,0.5) H8(-0.5,0.5) H9(0.5,0.5) H10(1.5,0.5) H11(2.5,0.5) H12(3.5,0.5) H13(4.5,0.5) H14(5.5,0.5) H15(6.5,0.5) H16(7.5,0.5) J1(-7.5,-0.5) J2(-6.5,-0.5) J3(-5.5,-0.5) J4(-4.5,-0.5) J5(-3.5,-0.5) J6(-2.5,-0.5) J7(-1.5,-0.5) J8(-0.5,-0.5) J9(0.5,-0.5) J10(1.5,-0.5) J11(2.5,-0.5) J12(3.5,-0.5) J13(4.5,-0.5) J14(5.5,-0.5) J15(6.5,-0.5) J16(7.5,-0.5) K1(-7.5,-1.5) K2(-6.5,-1.5) K3(-5.5,-1.5) K4(-4.5,-1.5) K5(-3.5,-1.5) K6(-2.5,-1.5) K7(-1.5,-1.5) K8(-0.5,-1.5) K9(0.5,-1.5) K10(1.5,-1.5) K11(2.5,-1.5) K12(3.5,-1.5) K13(4.5,-1.5) K14(5.5,-1.5) K15(6.5,-1.5) K16(7.5,-1.5) L1(-7.5,-2.5) L2(-6.5,-2.5) L3(-5.5,-2.5) L4(-4.5,-2.5) L5(-3.5,-2.5) L6(-2.5,-2.5) L7(-1.5,-2.5) L8(-0.5,-2.5) L9(0.5,-2.5) L10(1.5,-2.5) L11(2.5,-2.5) L12(3.5,-2.5) L13(4.5,-2.5) L14(5.5,-2.5) L15(6.5,-2.5) L16(7.5,-2.5) M1(-7.5,-3.5) M2(-6.5,-3.5) M3(-5.5,-3.5) M4(-4.5,-3.5) M5(-3.5,-3.5) M6(-2.5,-3.5) M7(-1.5,-3.5) M8(-0.5,-3.5) M9(0.5,-3.5) M10(1.5,-3.5) M11(2.5,-3.5) M12(3.5,-3.5) M13(4.5,-3.5) M14(5.5,-3.5) M15(6.5,-3.5) M16(7.5,-3.5) N1(-7.5,-4.5) N2(-6.5,-4.5) N3(-5.5,-4.5) N4(-4.5,-4.5) N5(-3.5,-4.5) N6(-2.5,-4.5) N7(-1.5,-4.5) N8(-0.5,-4.5) N9(0.5,-4.5) N10(1.5,-4.5) N11(2.5,-4.5) N12(3.5,-4.5) N13(4.5,-4.5) N14(5.5,-4.5) N15(6.5,-4.5) N16(7.5,-4.5) P1(-7.5,-5.5) P2(-6.5,-5.5) P3(-5.5,-5.5) P4(-4.5,-5.5) P5(-3.5,-5.5) P6(-2.5,-5.5) P7(-1.5,-5.5) P8(-0.5,-5.5) P9(0.5,-5.5) P10(1.5,-5.5) P11(2.5,-5.5) P12(3.5,-5.5) P13(4.5,-5.5) P14(5.5,-5.5) P15(6.5,-5.5) P16(7.5,-5.5) R1(-7.5,-6.5) R2(-6.5,-6.5) R3(-5.5,-6.5) R4(-4.5,-6.5) R5(-3.5,-6.5) R6(-2.5,-6.5) R7(-1.5,-6.5) R8(-0.5,-6.5) R9(0.5,-6.5) R10(1.5,-6.5) R11(2.5,-6.5) R12(3.5,-6.5) R13(4.5,-6.5) R14(5.5,-6.5) R15(6.5,-6.5) R16(7.5,-6.5) T1(-7.5,-7.5) T2(-6.5,-7.5) T3(-5.5,-7.5) T4(-4.5,-7.5) T5(-3.5,-7.5) T6(-2.5,-7.5) T7(-1.5,-7.5) T8(-0.5,-7.5) T9(0.5,-7.5) T10(1.5,-7.5) T11(2.5,-7.5) T12(3.5,-7.5) T13(4.5,-7.5) T14(5.5,-7.5) T15(6.5,-7.5) T16(7.5,-7.5)
  silkscreen extent -9.27,-8.5 8.5,8.5, body extent -8.5,-8.5 8.5,8.5, height 1.55
BGA144C100P12X12_1300X1300X161 [mm] "BGA, 144-Leads, Body 13.00x13.00mmx1.61mm, Pitch 1.00mm"
  round 0.5 smd: A1(-5.5,5.5) A2(-4.5,5.5) A3(-3.5,5.5) A4(-2.5,5.5) A5(-1.5,5.5) A6(-0.5,5.5) A7(0.5,5.5) A8(1.5,5.5) A9(2.5,5.5) A10(3.5,5.5) A11(4.5,5.5) A12(5.5,5.5) B1(-5.5,4.5) B2(-4.5,4.5) B3(-3.5,4.5) B4(-2.5,4.5) B5(-1.5,4.5) B6(-0.5,4.5) B7(0.5,4.5) B8(1.5,4.5) B9(2.5,4.5) B10(3.5,4.5) B11(4.5,4.5) B12(5.5,4.5) C1(-5.5,3.5) C2(-4.5,3.5) C3(-3.5,3.5) C4(-2.5,3.5) C5(-1.5,3.5) C6(-0.5,3.5) C7(0.5,3.5) C8(1.5,3.5) C9(2.5,3.5) C10(3.5,3.5) C11(4.5,3.5) C12(5.5,3.5) D1(-5.5,2.5) D2(-4.5,2.5) D3(-3.5,2.5) D4(-2.5,2.5) D5(-1.5,2.5) D6(-0.5,2.5) D7(0.5,2.5) D8(1.5,2.5) D9(2.5,2.5) D10(3.5,2.5) D11(4.5,2.5) D12(5.5,2.5) E1(-5.5,1.5) E2(-4.5,1.5) E3(-3.5,1.5) E4(-2.5,1.5) E5(-1.5,1.5) E6(-0.5,1.5) E7(0.5,1.5) E8(1.5,1.5) E9(2.5,1.5) E10(3.5,1.5) E11(4.5,1.5) E12(5.5,1.5) F1(-5.5,0.5) F2(-4.5,0.5) F3(-3.5,0.5) F4(-2.5,0.5) F5(-1.5,0.5) F6(-0.5,0.5) F7(0.5,0.5) F8(1.5,0.5) F9(2.5,0.5) F10(3.5,0.5) F11(4.5,0.5) F12(5.5,0.5) G1(-5.5,-0.5) G2(-4.5,-0.5) G3(-3.5,-0.5) G4(-2.5,-0.5) G5(-1.5,-0.5) G6(-0.5,-0.5) G7(0.5,-0.5) G8(1.5,-0.5) G9(2.5,-0.5) G10(3.5,-0.5) G11(4.5,-0.5) G12(5.5,-0.5) H1(-5.5,-1.5) H2(-4.5,-1.5) H3(-3.5,-1.5) H4(-2.5,-1.5) H5(-1.5,-1.5) H6(-0.5,-1.5) H7(0.5,-1.5) H8(1.5,-1.5) H9(2.5,-1.5) H10(3.5,-1.5) H11(4.5,-1.5) H12(5.5,-1.5) J1(-5.5,-2.5) J2(-4.5,-2.5) J3(-3.5,-2.5) J4(-2.5,-2.5) J5(-1.5,-2.5) J6(-0.5,-2.5) J7(0.5,-2.5) J8(1.5,-2.5) J9(2.5,-2.5) J10(3.5,-2.5) J11(4.5,-2.5) J12(5.5,-2.5) K1(-5.5,-3.5) K2(-4.5,-3.5) K3(-3.5,-3.5) K4(-2.5,-3.5) K5(-1.5,-3.5) K6(-0.5,-3.5) K7(0.5,-3.5) K8(1.5,-3.5) K9(2.5,-3.5) K10(3.5,-3.5) K11(4.5,-3.5) K12(5.5,-3.5) L1(-5.5,-4.5) L2(-4.5,-4.5) L3(-3.5,-4.5) L4(-2.5,-4.5) L5(-1.5,-4.5) L6(-0.5,-4.5) L7(0.5,-4.5) L8(1.5,-4.5) L9(2.5,-4.5) L10(3.5,-4.5) L11(4.5,-4.5) L12(5.5,-4.5) M1(-5.5,-5.5) M2(-4.5,-5.5) M3(-3.5,-5.5) M4(-2.5,-5.5) M5(-1.5,-5.5) M6(-0.5,-5.5) M7(0.5,-5.5) M8(1.5,-5.5) M9(2.5,-5.5) M10(3.5,-5.5) M11(4.5,-5.5) M12(5.5,-5.5)
  silkscreen extent -7.27,-6.5 6.5,6.5, body extent -6.5,-6.5 6.5,6.5, height 1.61
BZ [mm]
  oct 2.5x2.5 hole 2: 1(0,2.032) 2(0,-1.651)
  silkscreen extent -4.57,-4.6 4.63,4.59
C2012 [mm] "Chip Capacitor, 2-Leads, Body 2.0x1.2mm, IPC Low Density"
  rect 1x1.45 smd: 1(-1.2,0) 2(1.2,0)
  silkscreen extent -0.3,-0.63 0.3,0.63, body extent -0.98,-0.6 1.02,0.6, height 0.5
CASE-B_3528 [mm]
  rect 1.8x2.6 smd: 1(1.5,0) 2(-1.5,0)
  silkscreen extent -2.73,-1.65 3.16,1.65, body extent -1.85,-1.47 1.85,1.46, height 2.03
FFC/SM0.5-2H15 [mm] "Connector; FH12 Series; 15 Position; 0.5mm Spaced Bottom Contact"
  rect 0.3x1.3 smd: 1(-3.5,1.625) 2(-3,1.625) 3(-2.5,1.625) 4(-2,1.625) 5(-1.5,1.625) 6(-1,1.625) 7(-0.5,1.625) 8(0,1.625) 9(0.5,1.625) 10(1,1.625) 11(1.5,1.625) 12(2,1.625) 13(2.5,1.625) 14(3,1.625) 15(3.5,1.625)
  rect 1.8x2.2 smd: 16(-5.4,-1.625) 17(5.4,-1.625)
  silkscreen extent -5.3,-4.62 5.3,1.75, body extent -5.3,-4.62 5.3,0.97, height 2
HDR1X4 [mm] "Connector; Header; 4 Position"
  rect 1.5x1.5 hole 0.9: 1(0,0)
  round 1.5 hole 0.9: 2(2.54,0) 3(5.08,0) 4(7.62,0)
  silkscreen extent -1.27,-1.27 8.89,1.27, body extent -1.27,-1.27 8.89,1.27, height 7.58
HDR2X5 [mm] "Connector; Header; 5x2 Position"
  rect 1.5x1.5 hole 0.9: 1(0,0)
  round 1.5 hole 0.9: 2(0,2.54) 3(2.54,0) 4(2.54,2.54) 5(5.08,0) 6(5.08,2.54) 7(7.62,0) 8(7.62,2.54) 9(10.16,0) 10(10.16,2.54)
  silkscreen extent -1.27,-1.27 11.43,3.81
"Hearder2 7X2" [mm]
  rect 1.2x1.2 hole 0.8: 1(0,0)
  round 1.2 hole 0.8: 2(2,0) 3(0,-2) 4(2,-2) 5(0,-4) 6(2,-4) 7(0,-6) 8(2,-6) 9(0,-8) 10(2,-8) 11(0,-10) 12(2,-10) 13(0,-12) 14(2,-12)
  silkscreen extent -1,-13 3,1
"key 3*4*2" [mm]
  rect 1.15x1.7 smd: 1(-2.191,0) 2(2.159,0)
  silkscreen extent -2.03,-1.45 2,1.45
MHDR1X5 [mm] "Connector; Header; 5 Position"
  rect 1x1 hole 0.6: 1(0,0)
  round 1 hole 0.6: 2(1.27,0) 3(2.54,0) 4(3.81,0) 5(5.08,0)
  silkscreen extent -0.9,-0.9 5.98,0.9
"MLT-5020 BZ" [mm]
  rect 1.5x0.8 smd: 0(-1.75,1.75) 1(-1.75,-1.75) 2(1.75,-1.75)
  silkscreen extent -2.6,-2.6 2.6,2.6
QFN127P500X600X100_HS-9N [mm] "QFN, 8-Leads, Body 5.00x6.00mm, Pitch 1.27mm, Thermal Pad 4.00x3.40mm, IPC Medium Density"
  rect 0.8x0.55 smd: 1(-2.8,1.905) 2(-2.8,0.635) 3(-2.8,-0.635) 4(-2.8,-1.905) 5(2.85,-1.905) 6(2.85,-0.635) 7(2.85,0.635) 8(2.85,1.905)
  rect 3.4x4 smd paste+0 mask+0: 9(0,0)
  silkscreen extent -3.93,-2.65 3.15,2.65, body extent -3,-2.5 3,2.5, height 1
RESPBERRY-HAT [mm]
  round 4 hole 2.75: 0(-29,-49) 0(29,-49)
  rect 1.5x1.5 hole 0.9: 1(-24.13,-1.27)
  round 1.5 hole 0.9: 2(-24.13,1.27) 3(-21.59,-1.27) 4(-21.59,1.27) 5(-19.05,-1.27) 6(-19.05,1.27) 7(-16.51,-1.27) 8(-16.51,1.27) 9(-13.97,-1.27) 10(-13.97,1.27) 11(-11.43,-1.27) 12(-11.43,1.27) 13(-8.89,-1.27) 14(-8.89,1.27) 15(-6.35,-1.27) 16(-6.35,1.27) 17(-3.81,-1.27) 18(-3.81,1.27) 19(-1.27,-1.27) 20(-1.27,1.27) 21(1.27,-1.27) 22(1.27,1.27) 23(3.81,-1.27) 24(3.81,1.27) 25(6.35,-1.27) 26(6.35,1.27) 27(8.89,-1.27) 28(8.89,1.27) 29(11.43,-1.27) 30(11.43,1.27) 31(13.97,-1.27) 32(13.97,1.27) 33(16.51,-1.27) 34(16.51,1.27) 35(19.05,-1.27) 36(19.05,1.27) 37(21.59,-1.27) 38(21.59,1.27) 39(24.13,-1.27) 40(24.13,1.27)
  silkscreen extent -25.4,-2.54 25.4,2.54, body extent -25.4,-2.54 25.4,2.54, height 7.58
RGB [mil]
  rect 30x30 hole 10: 1(-65,25) 2(-65,-25) 3(65,-25) 4(65,25)
  silkscreen extent -90,-55 65,60
SMA(DO-214AC)_S1 [mm]
  rect 2x2 smd: 1(2.1,0) 2(-2.1,0)
  silkscreen extent -2.35,-1.5 2.35,1.5
"SMD-3215_2P FC - 135" [mm]
  rect 1x1.8 smd: 1(-1.25,0) 2(1.25,0)
  silkscreen extent -2.05,-1.2 2.05,1.2
"SMT-HEADER 6*2" [mm]
  rect 3x1.5 smd: 1(0,6.35) 2(0,3.81) 3(0,1.27) 4(0,-1.27) 5(0,-3.81) 6(0,-6.35)
  rect 3x1.5 smd far side: 7(0,6.35) 8(0,3.81) 9(0,1.27) 10(0,-1.27) 11(0,-3.81) 12(0,-6.35)
  silkscreen extent -0.53,-7.62 2.01,7.62
SOT-23(SOT-23-3) [mm]
  rect 1.25x0.7 smd: 1(1.25,-0.95) 2(1.25,0.95) 3(-1.25,0)
  silkscreen extent -0.65,-1.46 0.9,1.46, body extent -1.5,-1.5 1.5,1.5, height 1.3
sw*2 [mm]
  rect 1.27x0.76 smd: 1(-3.81,0.635) 2(-3.81,-0.635) 3(3.81,-0.635) 4(3.81,0.635)
  silkscreen extent -2.7,-2.07 2.7,2.07
TF卡座(短体) [mm]
  rect 1.15x3 smd: 0(0.227,1.27)
  rect 1.48x1.4 smd: 0(10.795,2.159)
  rect 0.7x1.25 smd: 1(9.097,3.937) 2(7.997,3.937) 3(6.897,3.937) 4(5.797,3.937) 5(4.697,3.937) 6(3.597,3.937) 7(2.497,3.937) 8(1.397,3.937)
  silkscreen extent 0,0 11,5.5
USB-MICRO-5P-2F [mm]
  round 0 hole 0.7: 0(-3.725,0) 0(1.125,0)
  rect 0.4x1.4 smd: 1(0,0) 2(-0.65,0) 3(-1.3,0) 4(-1.95,0) 5(-2.6,0)
  rect 1.4x1.9 hole 1.2 slot 1.7 at 90 deg: 6(2.3,2.65) 7(-4.9,2.65)
  silkscreen extent -5.3,-0.7 2.7,5.1
XTAL7_3225 [mil]
  rect 47.2x25.6 smd: 1(-47.25,-32.5) 2(47.25,-32.5) 3(47.25,32.5) 4(-47.25,32.5)
  silkscreen extent -79,-75 79,53

## Part data
BOOT: "Header, 4-Pin", LatestRevisionDate=17-Jul-2002, LatestRevisionNote="Re-released for DXP Platform.", Publisher="Altium Limited"
C1 C2 C4 C63 C67 C68 C69 C70 C71: library part "0402 100nF (104) 10% 16V", "贴片电容", Package=0402, SuppliersPartNumber=C1525, ComponentLink1Description=供应商, ComponentLink1URL=http://www.szlcsc.com/product/details_1877.html, Supplier=LC
C3 C5: library part "0402 100pF (101) 5% 50V", "贴片电容", Package=0402, SuppliersPartNumber=C1546, ComponentLink1Description=供应商, ComponentLink1URL=http://www.szlcsc.com/product/details_1898.html, Supplier=LC
C6 C9 C49 C50: library part "0402 10uF (106) 20% 6.3V", "贴片电容", Package=0402, SuppliersPartNumber=C15525, ComponentLink1Description=供应商, ComponentLink1URL=http://www.szlcsc.com/product/details_16204.html, Supplier=LC
C7 C53 C54 C58: library part "3528 100uF (107) 10% 6.3V", "钽电容", Package=3528, SuppliersPartNumber=C16133, ComponentLink1Description=供应商, ComponentLink1URL=http://www.szlcsc.com/product/details_16815.html, Supplier=LC
C8 C14 C17 C19 C22 C24 C25 C26 C27 C28 C29 C30 C32 C35: library part "0402 33nF (333) 20% 50V", "贴片电容", Package=0402, SuppliersPartNumber=C1585, ComponentLink1Description=供应商, ComponentLink1URL=http://www.szlcsc.com/product/details_1937.html, Supplier=LC
C10 C11 C15 C20 C21 C23 C31 C33 C34 C36 C37 C38 C39 C40 C41 C42 C43 C44 C45 C46 C47 C48 C51: library part "0402 470nF (474) 10% 10V", "贴片电容", Package=0402, SuppliersPartNumber=C47339, ComponentLink1Description=供应商, ComponentLink1URL=http://www.szlcsc.com/product/details_48344.html, Supplier=LC
C12 C13 C18 C52 C55 C56 C57: library part "0402 4.7uF (475) 20% 10V", "贴片电容", Package=0402, SuppliersPartNumber=C23733, ComponentLink1Description=供应商, ComponentLink1URL=http://www.szlcsc.com/product/details_24469.html, Supplier=LC
C16 C66: library part "0402 10nF (103) 10% 50V", "贴片电容", Package=0402, SuppliersPartNumber=C15195, ComponentLink1Description=供应商, ComponentLink1URL=http://www.szlcsc.com/product/details_15869.html, Supplier=LC
C59 C60 C61 C62: library part "0603 22uF (226) 20% 6.3V", "贴片电容", Package=0603, SuppliersPartNumber=C59461, ComponentLink1Description=供应商, ComponentLink1URL=http://www.szlcsc.com/product/details_60514.html, Supplier=LC
C64 C65: library part "0402 12pF (120) 5% 50V", "贴片电容", Package=0402, SuppliersPartNumber=C1547, ComponentLink1Description=供应商, ComponentLink1URL=http://www.szlcsc.com/product/details_1899.html, Supplier=LC
C72 C73: "贴片电容", LatestRevisionDate=17-Jul-2002, LatestRevisionNote="Re-released for DXP Platform.", PackageReference=RAD-0.3, Published=8-Jun-2000, Publisher="Altium Limited"
D1 D2 D3: library part "SMA(DO-214AC) SS54", "二极管", Package=SMA(DO-214AC), SuppliersPartNumber=C22452, ComponentLink1Description=供应商, ComponentLink1URL=http://www.szlcsc.com/product/details_23178.html, Supplier=LC
D4: library part "Diode 1N4148", "High Conductance Fast Diode", Code_JEDEC=DO-204-AH, ComponentLink1Description="Manufacturer Link", ComponentLink2Description=Datasheet, ComponentLink2URL=http://www.fairchildsemi.com/ds/1N%2F1N4148.pdf, DatasheetDocument=1997, LatestRevisionDate=17-Jul-2002, LatestRevisionNote="Re-released for DXP Platform.", PackageReference=DO-35, Publisher="Altium Limited"
F1: "Fuse", LatestRevisionDate=17-Jul-2002, LatestRevisionNote="Re-released for DXP Platform.", PackageDescription="Thru-Hole; 2 Leads", PackageReference=PIN-W2/E2.8, Published=8-Jun-2000, Publisher="Altium Limited"
FB1 FB2: library part "0805 600Ω 25% 100MHz", "贴片磁珠", Package=0805, SuppliersPartNumber=C1017, ComponentLink1Description=供应商, ComponentLink1URL=http://www.szlcsc.com/product/details_1369.html, Supplier=LC
FB5: library part "0805 100Ω 25% 100MHz", "贴片磁珠", Package=0805, SuppliersPartNumber=C1015, ComponentLink1Description=供应商, ComponentLink1URL=http://www.szlcsc.com/product/details_1367.html, Supplier=LC
JTAG1: "Header, 7-Pin, Dual row", LatestRevisionDate=17-Jul-2002, LatestRevisionNote="Re-released for DXP Platform.", Publisher="Altium Limited"
L5: library part "0402 10nH 5%", "贴片电感", Package=0402, SuppliersPartNumber=C27147, ComponentLink1Description=供应商, ComponentLink1URL=http://www.szlcsc.com/product/details_27896.html, Supplier=LC
L6: library part "0402 39nH", "贴片电感", Package=0402, SuppliersPartNumber=C26443, ComponentLink1Description=供应商, ComponentLink1URL=http://www.szlcsc.com/product/details_27187.html, Supplier=LC
LS1 LS2: "Electrical Bell", LatestRevisionDate=17-Jul-2002, LatestRevisionNote="Re-released for DXP Platform.", PackageReference=PIN2, Published=24-Mar-1999, Publisher="Altium Limited"
MCU_CFG1: "Header, 5-Pin", LatestRevisionDate=17-Jul-2002, LatestRevisionNote="Re-released for DXP Platform.", Publisher="Altium Limited"
P3: library part "Header 5X2", "Header, 5-Pin, Dual row", LatestRevisionDate=17-Jul-2002, LatestRevisionNote="Re-released for DXP Platform.", Publisher="Altium Limited"
PCAM: "Header, 15-Pin", LatestRevisionDate=17-Jul-2002, LatestRevisionNote="Re-released for DXP Platform.", Publisher="Altium Limited"
PMOD1 PMOD2 PMOD3 PMOD4 PMOD5 PMOD6 PMOD7 PMOD8 PMOD9: "Header, 6-Pin, Dual row", LatestRevisionDate=17-Jul-2002, LatestRevisionNote="Re-released for DXP Platform.", Publisher="Altium Limited"
Q1 Q2: library part "SOT-23 SS8050 Y1", "三极管", Package=SOT-23, SuppliersPartNumber=C2150, ComponentLink1Description=供应商, ComponentLink1URL=http://www.szlcsc.com/product/details_2507.html, Supplier=LC
R1 R10 R11 R15: library part "0402 4.7KΩ (4701) 1%", "贴片电阻", Package=0402, SuppliersPartNumber=C25900, ComponentLink1Description=供应商, ComponentLink1URL=http://www.szlcsc.com/product/details_26643.html, Supplier=LC
R2 R5 R7 R42 R43 R44: "贴片电阻", LatestRevisionDate=17-Jul-2002, LatestRevisionNote="Re-released for DXP Platform.", PackageReference=AXIAL-0.3, Published=8-Jun-2000, Publisher="Altium Limited"
R3 R4 R6: library part Res, "贴片电阻", LatestRevisionDate=17-Jul-2002, LatestRevisionNote="Re-released for DXP Platform.", PackageReference=AXIAL-0.3, Published=8-Jun-2000, Publisher="Altium Limited"
R8: library part "0402 200Ω (2000) 1%", "贴片电阻", Package=0402, SuppliersPartNumber=C25087, ComponentLink1Description=供应商, ComponentLink1URL=http://www.szlcsc.com/product/details_25830.html, Supplier=LC
R9 R12 R16 R17 R22 R23: library part "0402 100Ω (1000) 1%", "贴片电阻", Package=0402, SuppliersPartNumber=C25076, ComponentLink1Description=供应商, ComponentLink1URL=http://www.szlcsc.com/product/details_25819.html, Supplier=LC
R13 R14 R39 R40 R41: library part "0402 10KΩ (1002) 1%", "贴片电阻", Package=0402, SuppliersPartNumber=C25744, ComponentLink1Description=供应商, ComponentLink1URL=http://www.szlcsc.com/product/details_26487.html, Supplier=LC
R18 R21: library part "0603 1.8KΩ (1801) 1%", "贴片电阻", Package=0603, SuppliersPartNumber=C4177, ComponentLink1Description=供应商, ComponentLink1URL=http://www.szlcsc.com/product/details_4584.html, Supplier=LC
R19 R29 R30 R34: library part "0402 1KΩ (1001) 1%", "贴片电阻", Package=0402, SuppliersPartNumber=C11702, ComponentLink1Description=供应商, ComponentLink1URL=http://www.szlcsc.com/product/details_12256.html, Supplier=LC
R20: library part "0402 49.9Ω (49R9) 1%", "贴片电阻", Package=0402, SuppliersPartNumber=C25120, ComponentLink1Description=供应商, ComponentLink1URL=http://www.szlcsc.com/product/details_25863.html, Supplier=LC
R24 R25: library part "0402 1.5KΩ (1501) 1%", "贴片电阻", Package=0402, SuppliersPartNumber=C25867, ComponentLink1Description=供应商, ComponentLink1URL=http://www.szlcsc.com/product/details_26610.html, Supplier=LC
R26 R27 R31 R35 R36 R38: library part "0402 0Ω (0R0) 1%", "贴片电阻", Package=0402, SuppliersPartNumber=C17168, ComponentLink1Description=供应商, ComponentLink1URL=http://www.szlcsc.com/product/details_17853.html, Supplier=LC
R28: library part "0805 390Ω (3900) 1%", "贴片电阻", Package=0805, SuppliersPartNumber=C17655, ComponentLink1Description=供应商, ComponentLink1URL=http://www.szlcsc.com/product/details_18343.html, Supplier=LC
R32 R33: library part "0402 2KΩ (2001) 1%", "贴片电阻", Package=0402, SuppliersPartNumber=C4109, ComponentLink1Description=供应商, ComponentLink1URL=http://www.szlcsc.com/product/details_4516.html, Supplier=LC
R37: library part "0402 1MΩ (1004) 1%", "贴片电阻", Package=0402, SuppliersPartNumber=C26083, ComponentLink1Description=供应商, ComponentLink1URL=http://www.szlcsc.com/product/details_26826.html, Supplier=LC
Rp1 Rp2 Rp3 Rp4 Rp5 Rp6: library part "0603*4 470Ω (471) 5%", "贴片排阻", Package=0603*4, SuppliersPartNumber=C25510, ComponentLink1Description=供应商, ComponentLink1URL=http://www.szlcsc.com/product/details_26253.html, Supplier=LC
S1 S2 S3 S6: "Switch"
  S1 S2: LatestRevisionDate=17-Jul-2002, LatestRevisionNote="Re-released for DXP Platform.", PackageDescription="Switch; 2 Leads", PackageReference=SPST-2, Published=24-Mar-1999, Publisher="Altium Limited"
S4 S5: "DIP Switch, 2 Position, SPST", LatestRevisionDate=17-Jul-2002, LatestRevisionNote="Re-released for DXP Platform.", PackageReference=DIP-4, Published=24-Mar-1999, Publisher="Altium Limited"
XTAL1: library part 有源晶体
Y1 Y2: library part XTAL1
Y3: library part "SMD-3215_2P 32.768KHz 20ppm 12.5pF", "贴片晶振", Package=SMD-3215_2P, SuppliersPartNumber=C32346, ComponentLink1Description=供应商, ComponentLink1URL=http://www.szlcsc.com/product/details_33310.html, Supplier=LC

## Via types
v1: diameter 17.72, hole 7.87, Top Layer to Bottom Layer, tented both sides, 166 vias
v2: diameter 19.68, hole 7.87, Top Layer to Bottom Layer, 12 vias

## Nets (pads, with @x,y where several pads share a name; then routed paths per layer and width w, separated by ;. In a path a pad name is that pad's centre, name@x,y a point inside that pad or via, vN(x,y) a via of type N, cw(c..) or ccw(c..) an arc to the next point about the centre after c; other vN are vias at no path point)
1V0: C6.2 C7.1 C8.2 C11.2 C13.2 C14.2 C17.2 C18.2 C19.2 C21.2 C22.2 C23.2 U1.E10 U1.F7 U1.F9 U1.F11 U1.G6 U1.H9 U1.J6 U1.K9 U1.L8
1V8: C9.2 C12.2 C15.2 C20.2 C24.2 C25.2 L5.1 U1.F8 U1.G10 U1.J10 U1.K11 U1.L10
3V3: C1.1 C2.2 C4.2 C26.1 C27.2 C28.2 C29.2 C30.2 C31.1 C32.2 C33.2 C34.2 C35.2 C36.2 C37.2 C38.2 C39.2 C40.2 C41.2 C42.2 C43.2 C44.2 C45.2 C46.2 C47.2 C48.2 C49.2 C50.2 C51.2 C52.2 C53.1 C54.1 C55.2 C56.2 C57.2 C58.1 C59.2 C60.2 C61.2 C62.2 C63.2 C68.2 C69.2 C70.2 C72.2 C73.2 D3.2 D4.1 FB1.1 FB2.1 FB5.1 HAT1.1 HAT1.17 JTAG1.2 LS2.1 PMOD1.1 PMOD1.7 PMOD2.1 PMOD2.7 PMOD3.1 PMOD3.7 PMOD4.1 R1.1 R2.2 R4.2 R6.2 R8.2 R10.2 R11.2 R13.2 R14.2 R15.2 R18.2 R19.2 R21.2 R28.2 R29.1 R39.2 R41.2 R42.2 R43.2 R44.2 SD*1.4 U1.A6 U1.A16 U1.B3 U1.B13 U1.C10 U1.D7 U1.E4 U1.E14 U1.F1 U1.H15 U1.J2 U1.J12 U1.L6 U1.L16 U1.M3 U1.M13 U1.N10 U1.P7 U1.R4 U1.R14 U1.T1 U1.T11 U2.8 U3.A6 U3.D6 U3.E1 U5.E5 U5.E6 U5.E7 U5.E8 U5.F5 U5.F8 U5.L6 XTAL1.4 | length 271.4
  Top Layer w3.5: v1(4784.64,3019.97) U1.D7@4784.64,3047.81 ; U1.J12@4784.64,3326.19 4785,3325.84 v1(4812.48,3325.84) ; U1.L6@5007.36,3214.84 v1(5035.19,3214.84) ; v1(5035.19,3047.81) U1.J2@5063.03,3047.81 ; U1.M3@5118.71,3159.16 v1(5146.55,3159.16) ; v1(5159.22,2732.84) 5161.71,2732.84 U3.E1@5177.59,2716.96 ; U3.D6@5302.86,2633.44 5320.47,2615.84 v1(5320.22,2615.84)
  Top Layer w6: v1@3703.26,2709.84 XTAL1.4@3737.83,2744.41
  Bottom Layer w6: C63.2@3691.33,2681.67 3703.22,2693.56 v1(3703.22,2709.84)
5V0: F1.1
50MHz: U5.M12 XTAL1.3 | length 105.5
  Top Layer w15: XTAL1.3@3808.59,2814.04 U5.M12@3883.16,2888.61
AGND: R38.1 U5.G6 U5.H6
ANALOG1: PMOD5.6 U5.J1 | length 621.6
  Top Layer w4: PMOD5.6@3064,3339 3585,3339 3645.64,3278.36 U5.J1@3660.45,3278.36
ANALOG2: PMOD5.5 U5.J2 | length 673
  Top Layer w4: PMOD5.5@3064,3239 3132,3239 3196.5,3303.5 3607.38,3303.5 3660.36,3250.52 U5.J2@3688.29,3250.52
ANALOG3: PMOD5.10 U5.K1 | length 653.5
  Top Layer w4: v1(3153,3173) 3153,3217 3186.52,3250.52 U5.K1@3632.61,3250.52
  Bottom Layer w4: PMOD5.10@3064,3139 3141,3139 3153,3151 v1(3153,3173)
ANALOG4: PMOD5.9 U5.K2 | length 789.3
  Top Layer w4: v1(3176,3192) 3176,3217 3201,3242 3616,3242 3635.32,3222.68 U5.K2@3660.45,3222.68
  Bottom Layer w4: PMOD5.9@3064,3039 3170,3039 3176,3045 v1(3176,3192)
ANALOG5: PMOD5.4 U5.L1 | length 614.7
  Top Layer w4: PMOD5.4@3064,3139 3190,3139 3196.5,3145.5 3196.5,3212.5 3206.68,3222.68 U5.L1@3604.77,3222.68
ANALOG6: PMOD5.3 U5.L2 | length 729.3
  Top Layer w4: PMOD5.3@3064,3039 3200,3039 3216,3055 3216,3192 3238,3214 3586,3214 3605.16,3194.84 U5.L2@3632.61,3194.84
ANALOG7: U5.M1 | length 741.8
  Top Layer w4: 3217,2698.45 3381.45,2698.45 3430.34,2747.34 3430.34,3048.24 U5.M1@3576.93,3194.84
ANALOG8: U5.M2 | length 737.4
  Top Layer w4: 3240,2685 3418,2685 3440,2707 3440,3002.23 U5.M2@3604.77,3167
ANALOG9: PMOD5.11 U5.K3 | length 642.6
  Top Layer w4: v1(3660.36,3194.84) U5.K3@3688.29,3194.84
  Bottom Layer w4: PMOD5.11@3064,3239 3616.2,3239 v1(3660.36,3194.84)
ANALOG10: PMOD5.12 U5.J3 | length 700.3
  Top Layer w4: v1(3688,3223) 3688.32,3222.68 U5.J3@3716.13,3222.68
  Bottom Layer w4: PMOD5.12@3064,3339 3252,3339 3307,3284 3627,3284 v1(3688,3223)
ANALOG11: U5.M3 | length 777.7
  Top Layer w4: 3232,2634 3414,2634 3458,2678 3458,2964.55 U5.M3@3632.61,3139.16
ANALOG12: U5.L3 | length 794.7
  Top Layer w4: 3249,2649 3402,2649 3450,2697 3450,2985 3632,3167 U5.L3@3660.45,3167
ANALOG13: PMOD4.3 U5.L4 | length 820.9
  Top Layer w4: 3251,2617 3428,2617 3474,2663 3474,2948.69 3664.47,3139.16 U5.L4@3688.29,3139.16
AVDD: C66.1 C67.1 FB5.2 U5.G5 U5.H5
BANK14_IO1: S2.1 U1.K12 | length 653.9
  Top Layer w3.5: U1.K12@4812.48,3354.03 v1(4840.32,3354.03)
  Bottom Layer w3.5: v1(4840.32,3354.03) 4840.32,3387.64 5259.22,3806.54
BANK14_IO2: LED1.3 U1.L14 | length 27.8
  Top Layer w3.5: U1.L14@4784.65,3437.55 v1(4784.65,3465.39)
BANK14_IO3: HAT1.5 U1.M14 | length 1522
  Top Layer w3.5: HAT1.5@3958.5,4192 3958.5,4003.47 3990.87,3971.1 4744.9,3971.1 4754.46,3961.54 4754.46,3551.61 4812.48,3493.58 U1.M14@4812.48,3465.39
BANK14_IO4: LED1.1 U1.K13 | length 27.8
  Top Layer w3.5: U1.K13@4784.64,3381.87 v1(4784.65,3409.71)
BANK14_IO5: LED1.4 U1.L13 | length 27.8
  Top Layer w3.5: U1.L13@4812.48,3409.71 v1(4812.48,3437.55)
BANK14_IO6: R24.1 U1.M12 | length 27.8
  Top Layer w3.5: v1(4840.32,3409.71) U1.M12@4868.16,3409.71
BANK14_IO7: HAT1.3 U1.M16 | length 1527.5
  Top Layer w3.5: HAT1.3@3858.5,4192 3858.5,4000.5 3902,3957 4729,3957 4735.22,3950.78 4735.22,3542.65 U1.M16@4756.81,3521.07
BANK14_IO8: HAT1.7 U1.N16 | length 1331.9
  Top Layer w3.5: HAT1.7@4058.5,4192 4058.5,4013.5 4090,3982 4207,3982 4752.34,3982 4770.22,3964.11 4770.22,3563.33 U1.N16@4784.64,3548.91
BANK14_IO9: HAT1.12 U1.P15 | length 1233.4
  Top Layer w3.5: HAT1.12@4258.5,4292 4308.5,4242 4308.5,4071.5 4350,4030 4775.65,4030 4814.02,3991.63 4814.02,3599.04 4840.32,3572.74 U1.P15@4840.32,3548.91
BANK14_IO10: HAT1.11 U1.P16 | length 1124.1
  Top Layer w3.5: HAT1.11@4258.5,4192 4258.5,4055.5 4299,4015 4776,4015 4802.89,3988.11 4802.89,3586.33 U1.P16@4812.48,3576.74
BANK14_IO11: HAT1.15 U1.R15 | length 966.5
  Top Layer w3.5: HAT1.15@4458.5,4192 4458.5,4085.5 4489,4055 4799,4055 4847.32,4006.68 4847.32,3622.92 4868.16,3602.08 U1.R15@4868.16,3576.74
BANK14_IO12: HAT1.13 U1.R16 | length 1016.2
  Top Layer w3.5: HAT1.13@4358.5,4192 4358.5,4072.5 4389,4042 4780.3,4042 4840.32,3981.97 U1.R16@4840.32,3604.58
BANK14_IO13: HAT1.18 U1.T14 | length 938.9
  Top Layer w3.5: HAT1.18@4558.5,4292 4608,4242.5 4686,4242.5 4708.5,4220 4708.5,4143.3 4756.81,4095 4802.33,4095 4923.84,3973.49 U1.T14@4923.84,3576.74
BANK14_IO14: HAT1.16 U1.T15 | length 1017.9
  Top Layer w3.5: HAT1.16@4458.5,4292 4508.5,4242 4508.5,4106.5 4547,4068 4801.79,4068 4896,3973.79 U1.T15@4896,3604.58
BANK14_IO15: HAT1.10 U1.N13 | length 1429.8
  Top Layer w3.5: HAT1.10@4158.5,4292 4208.5,4242 4208.5,4045.5 4249,4005 4776.1,4005 4794.52,3986.58 4794.52,3572.63 4868.76,3498.4 4868.76,3465.98 U1.N13@4868.16,3465.39
BANK14_IO16: HAT1.21 U1.P13 | length 798.2
  Top Layer w3.5: HAT1.21@4758.5,4192 4758.5,4159.5 4947.22,3970.78 4947.22,3578.06 4896,3526.83 U1.P13@4896,3493.23
BANK14_IO17: HAT1.8 U1.N14 | length 1489.3
  Top Layer w3.5: HAT1.8@4058.5,4292 4108.5,4242 4108.5,4030.5 4145,3994 4405,3994 4771,3994 4787.52,3977.48 4787.52,3569.73 4840.32,3516.93 U1.N14@4840.32,3493.23
BANK14_IO18: HAT1.19 U1.P14 | length 864.6
  Top Layer w3.5: HAT1.19@4658.5,4192 4658.5,4107.5 4683,4083 4800.19,4083 4914.22,3968.96 4914.22,3593.84 4868.16,3547.78 U1.P14@4868.16,3521.07
BANK14_IO19: HAT1.27 U1.N12 | length 834.7
  Top Layer w3.5: U1.N12@4896,3437.55 4918.07,3437.55 5007.11,3526.59 5007.11,4140.61 HAT1.27@5058.5,4192
BANK14_IO20: HAT1.31 U1.P10 | length 974.8
  Top Layer w3.5: U1.P10@4979.52,3409.71 4977.47,3411.76 4977.47,3429.73 5036.22,3488.49 5036.22,4098.22 5070,4132 5198.5,4132 HAT1.31@5258.5,4192
BANK14_IO21: HAT1.28 U1.P11 | length 967.8
  Top Layer w3.5: U1.P11@4951.68,3437.55 4951.68,3461.25 5019.22,3528.8 5019.22,4122.22 5045,4148 5093,4148 5108,4163 5108,4242.5 HAT1.28@5058.5,4292
BANK14_IO22: HAT1.24 U1.R12 | length 862.7
  Top Layer w3.5: HAT1.24@4858.5,4292 4908.5,4242 4908.5,4049.5 4982.22,3975.78 4982.22,3549.84 4951.68,3519.29 U1.R12@4951.68,3493.23
BANK14_IO23: HAT1.26 U1.T12 | length 793.2
  Top Layer w3.5: HAT1.26@4958.5,4292 4995.9,4254.6 4995.9,3537.45 U1.T12@4979.52,3521.07
BANK14_IO24: HAT1.23 U1.R13 | length 725.7
  Top Layer w3.5: HAT1.23@4858.5,4192 4858.5,4073.5 4957.22,3974.78 4957.22,3577.91 4923.84,3544.53 U1.R13@4923.84,3521.07
BANK14_IO25: HAT1.22 U1.T13 | length 881.8
  Top Layer w3.5: HAT1.22@4758.5,4292 4808.5,4242 4887,4242 4901,4228 4901,4041 4966.22,3975.78 4966.22,3842.94 4967.03,3842.14 4967.03,3564.25 U1.T13@4951.68,3548.91
BANK14_IO26: HAT1.33 U1.R10 | length 1021.9
  Top Layer w3.5: U1.R10@5007.36,3437.55 5029.43,3437.55 5053.22,3461.34 5053.22,4073 5098.22,4118 5284.5,4118 HAT1.33@5358.5,4192
BANK14_IO27: HAT1.29 U1.R11 | length 846.6
  Top Layer w3.5: U1.R11@4979.52,3465.39 5003.22,3465.39 5026.96,3489.13 5026.96,4115.05 5050.91,4139 5105.5,4139 HAT1.29@5158.5,4192
BANK14_IO28: HAT1.37 U1.N9 | length 1317.1
  Top Layer w3.5: U1.N9@4979.52,3354.03 5002.42,3354.03 5084.22,3435.84 5084.22,4036.78 5142.44,4095 5528,4095 5558.5,4125.5 HAT1.37@5558.5,4192
BANK14_IO29: HAT1.36 U1.P9 | length 1255.7
  Top Layer w3.5: U1.P9@5007.36,3381.87 5007.36,3403.95 5060.22,3456.81 5060.22,4043.22 5128,4111 5398.95,4111 5408.5,4120.55 5408.5,4242 HAT1.36@5458.5,4292
BANK14_IO30: Rp1.5 U1.M6 | length 1128.4
  Top Layer w3.5: U1.M6@5035.19,3242.68 v1(5063.03,3242.68)
  Bottom Layer w3.5: v1(5063.03,3242.68) 5104.16,3242.68 5496.33,3634.85 Rp1.5@6001.18,3634.85
BANK14_IO31: U1.N6
BANK14_IO32: Rp2.8 U1.P8 | length 1370.9
  Top Layer w3.5: U1.P8@5035.19,3354.03 5068.8,3354.03 5127.6,3412.84 5473.84,3412.84 5909,3848 5909,4033 5916,4040 v1(5943,4040)
  Bottom Layer w3.5: v1@5938,4040 v1@5950.11,4040 ; v1(5943,4040) Rp2.8@6001.49,4040
BANK14_IO33: HAT1.40 U1.R8 | length 1401.4
  Top Layer w3.5: U1.R8@5063.03,3381.87 5085.11,3381.87 5107.22,3403.99 5107.22,4036.26 5148.96,4078 5544.5,4078 5608.5,4142 5608.5,4242 HAT1.40@5658.5,4292
BANK14_IO34: Rp2.7 U1.T7 | length 1236.3
  Top Layer w3.5: U1.T7@5118.71,3381.87 5140.68,3403.84 5481.84,3403.84 5916,3838 5916,3994 5924,4002 v1(5943,4002)
  Bottom Layer w3.5: v1@5938,4002 v1(5943,4002) 5943.59,4002.59 Rp2.7@6001.49,4002.59
BANK14_IO35: HAT1.38 U1.T8 | length 1339.7
  Top Layer w3.5: U1.T8@5090.87,3409.71 5090.87,3432.59 5091.22,3432.94 5091.22,4032.05 5144.86,4085.68 5537.69,4085.68 5599,4147 5599,4251.5 HAT1.38@5558.5,4292
BANK14_IO36: HAT1.35 U1.T9 | length 1098.6
  Top Layer w3.5: U1.T9@5063.03,3437.55 5074.22,3448.74 5074.22,4039.22 5139,4104 5446.86,4104 5458.5,4115.64 HAT1.35@5458.5,4192
BANK14_IO37: HAT1.32 U1.T10 | length 1073
  Top Layer w3.5: U1.T10@5035.19,3465.39 5046.22,3476.42 5046.22,4085.22 5086,4125 5278,4125 5308.5,4155.5 5308.5,4242 HAT1.32@5258.5,4292
BANK14_IO38: Rp1.7 U1.R5 | length 1035.6
  Top Layer w3.5: U1.R5@5146.55,3298.36 5146.55,3320.43 5195.12,3369 5496,3369 5831,3704 v1@5943,3704
  Bottom Layer w3.5: v1(5943,3703.74) Rp1.7@6001.18,3703.74
BANK14_IO39: Rp1.6 U1.T5 | length 970.1
  Top Layer w3.5: U1.T5@5174.39,3326.19 5208.03,3359.84 5500.84,3359.84 5813,3672 v1(5943,3672)
  Bottom Layer w3.5: v1(5943,3672) 6000.93,3672 Rp1.6@6001.18,3672.25
BANK14_IO40: Rp2.5 U1.R6 | length 1206.1
  Top Layer w3.5: U1.R6@5118.71,3326.19 5118.71,3348.27 5159.44,3389 5489.33,3389 5943,3842.67 v1(5943,3934)
  Bottom Layer w3.5: v1@5938,3934 v1(5943,3934) 6001.19,3934 Rp2.5@6001.49,3933.7
BANK14_IO41: Rp2.6 U1.R7 | length 1246.5
  Top Layer w3.5: U1.R7@5090.87,3354.03 5112.95,3354.03 5155.75,3396.84 5487.27,3396.84 5923,3832.57 5923,3961.06 5932.94,3971 v1(5943,3971)
  Bottom Layer w3.5: v1@5938,3971 v1(5943,3971) 6001.39,3971 Rp2.6@6001.49,3971.1
BANK14_IO42: Rp1.8 U1.P6 | length 1093.7
  Top Layer w3.5: U1.P6@5090.87,3298.36 5112.95,3298.36 5195.59,3381 5495,3381 5854,3740 v1(5943,3740)
  Bottom Layer w3.5: v1(5943,3740) 6000.03,3740 Rp1.8@6001.18,3741.15
BANK15_IO1: U1.D8
BANK15_IO2: U1.E11
BANK15_IO3: U1.D11
BANK15_IO4: U1.F12
BANK15_IO5: U1.F13
BANK15_IO6: U1.H11
BANK15_IO7: U1.G12
BANK15_IO8: U1.H12
BANK15_IO9: U1.G11
BANK34_IO1: U1.L5 | length 27.8
  Top Layer w3.5: U1.L5@5035.19,3187 v1(5063.03,3187)
BANK34_IO2: U1.L4 | length 27.8
  Top Layer w3.5: U1.L4@5063.03,3159.16 v1(5090.87,3159.16)
BANK34_IO3: Rp4.5 U1.M4 | length 959.2
  Top Layer w3.5: U1.M4@5090.87,3187 v1(5118.71,3187)
  Bottom Layer w3.5: v1(5118.71,3187) 5217.41,3285.7 5349,3285.7 5358.24,3294.94 5363.83,3294.94 5373.08,3285.7 Rp4.5@6001.49,3285.7
BANK34_IO4: Rp5.6 U1.M2 | length 1164
  Top Layer w3.5: U1.M2@5146.55,3131.32 5175.93,3131.32 5920.26,2387 v1(5943,2387)
  Bottom Layer w3.5: v1@5941,2387 v1(5943,2387) 5998.76,2387 Rp5.6@5999.81,2385.95
BANK34_IO5: Rp5.5 U1.M1 | length 1140.1
  Top Layer w3.5: U1.M1@5174.39,3103.48 5258.03,3019.84 5271.71,3019.84 v1(5943,2348.55)
  Bottom Layer w3.5: v1@5941,2348.55 v1(5943,2348.55) Rp5.5@5999.81,2348.55
BANK34_IO6: Rp6.5 U1.N3 | length 1082.9
  Top Layer w3.5: U1.N3@5146.55,3187 5179.55,3187 5729.86,2636.7 v1(5943,2636.7)
  Bottom Layer w3.5: v1(5943,2636.7) Rp6.5@6001.49,2636.7
BANK34_IO7: Rp5.8 U1.N2 | length 1117.2
  Top Layer w3.5: U1.N2@5174.39,3159.16 5197.49,3159.16 5901.66,2455 v1(5943,2455)
  Bottom Layer w3.5: v1(5943,2455) 5999.65,2455 Rp5.8@5999.81,2454.85
BANK34_IO8: Rp5.7 U1.N1 | length 1093.3
  Top Layer w3.5: U1.N1@5202.23,3131.32 5916.1,2417.44 v1(5943,2417.44)
  Bottom Layer w3.5: v1(5943,2417.44) Rp5.7@5999.81,2417.44